# Allegro board M248V10_200119.brd
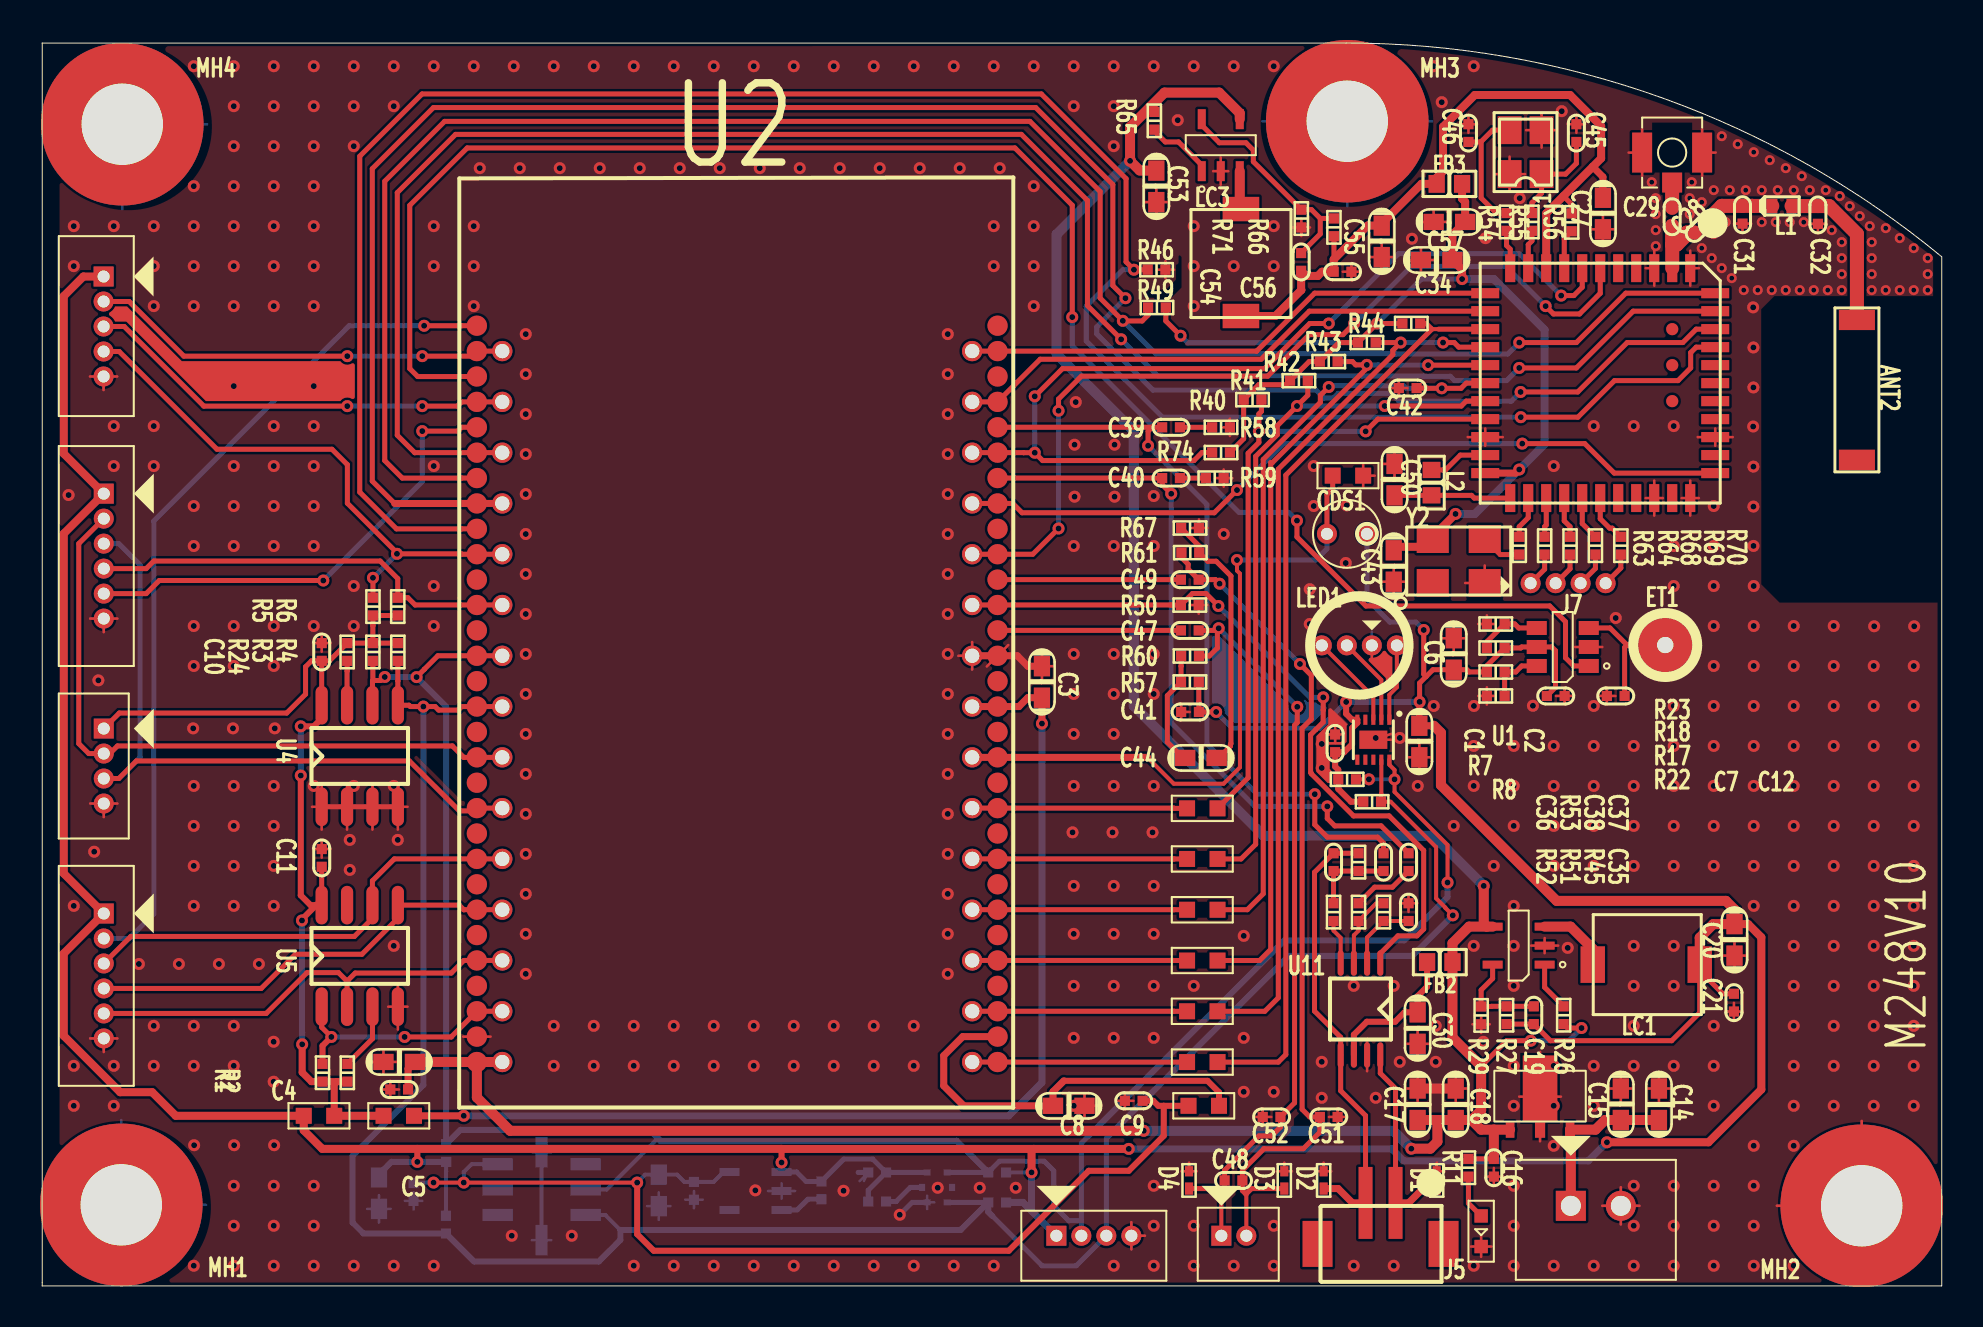
[diagram p0: board, top side]
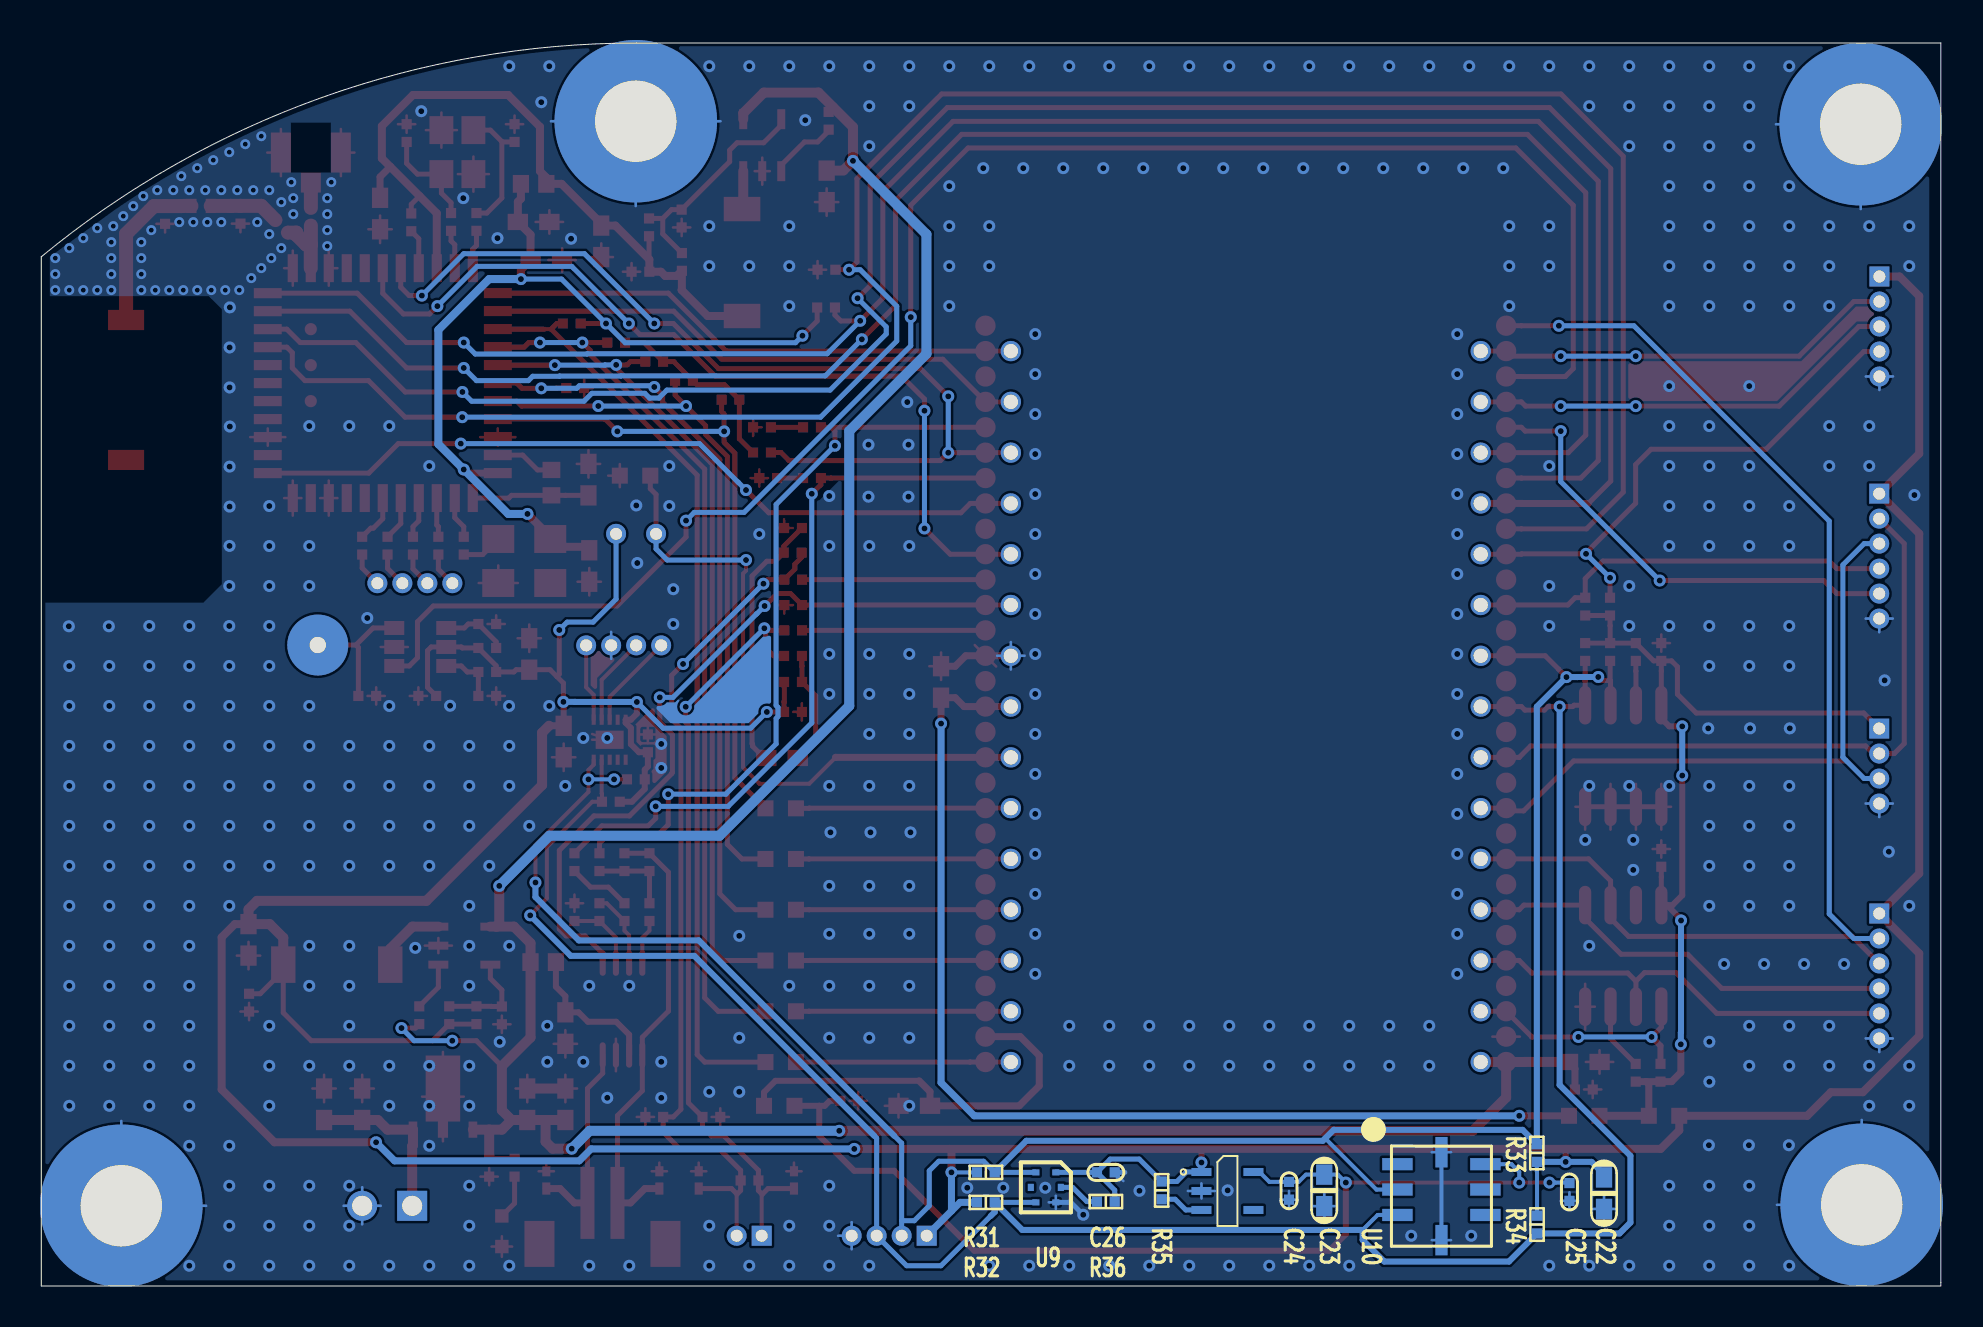
[diagram p1: board, bottom side, seen from below]

Outline 94.98 x 62.17 mm; copper layers: TOP, BOTTOM. Coordinates in mm from the lower left corner of the outline.
Outline path: 0,62.17 0,0 94.98,0 94.98,51.48 arc(81.03,59.42) 65.21,62.17 0,62.17

## Design rules (mm)
constraint set DEFAULT: min track width 0.127

## Placement (name value [footprint] x y rotation side)
ANT1  U.FL  [MM5829-2700]  81.5 56.69 180 top
ANT2  CHIP ANT  [AT7020]  89.74 40.82 0 top
C1  104  [C0402]  64.65 27.14 270 top
C2  1uF  [C0603]  68.86 27.23 270 top
C3  1uF  [C0603]  49.99 30.21 270 top
C4  104  [C0402]  17.85 9.83 0 top
C5  10uF  [C0603]  17.85 11.2 180 top
C6  4.7uF  [C0603]  70.58 31.61 270 top
C7  104  [C0402]  75.68 29.51 180 top
C8  1uF  [C0603]  51.33 9.01 180 top
C9  104  [C0402]  54.58 9.26 0 top
C10  104  [C0402]  13.98 31.71 270 top
C11  104  [C0402]  13.98 21.41 270 top
C12  101  [C0402]  78.68 29.51 0 top
C14  10uF  [C0603]  80.84 9.09 90 top
C15  1uF  [C0603]  78.94 9.09 270 top
C16  104  [C0402]  72.59 5.91 90 top
C17  10uF  [C0603]  68.78 9.09 90 top
C18  10uF  [C0603]  70.68 9.09 90 top
C19  103  [C0402]  74.58 13.54 270 top
C20  10uF  [C0603]  84.62 17.31 270 top
C21  104  [C0402]  84.59 14.17 90 top
C22  1uF  [C0603]  16.84 4.64 90 bottom
C23  2.2uF  [C0603]  30.83 4.78 90 bottom
C24  104  [C0402]  32.59 4.76 90 bottom
C25  104  [C0402]  18.57 4.7 90 bottom
C26  104  [C0402]  41.75 5.68 0 bottom
C27  4.7uF  [C0603]  78.04 53.64 270 top
C28  33pF  [C0402]  82.96 53 45 top
C29  NC  [C0402]  81.5 53.48 270 top
C30  2.2uF  [C0603]  68.78 12.9 90 top
C31  NC  [C0402]  85.02 53.58 90 top
C32  NC  [C0402]  88.79 53.57 90 top
C34  1uF  [C0603]  69.73 51.31 0 top
C35  1uF  [C0402]  68.32 18.7 270 top
C36  1000pF  [C0402]  64.57 21.2 90 top
C37  33nF  [C0402]  68.32 21.2 270 top
C38  33nF  [C0402]  67.07 21.2 270 top
C39  104  [C0402]  56.45 42.95 180 top
C40  104  [C0402]  56.45 40.41 180 top
C41  1uF  [C0402]  57.39 28.71 0 top
C42  NI-27pF  [C0402]  68.28 44.91 0 top
C43  4.7uF  [C0603]  67.58 36.01 90 top
C44  10uF  [C0603]  57.94 26.41 180 top
C45  10pF  [C0402]  76.71 57.66 270 top
C46  10pF  [C0402]  71.31 57.66 270 top
C47  104  [C0402]  57.38 32.79 0 top
C48  101  [C0402]  59.57 5.28 180 top
C49  104  [C0402]  57.38 35.33 0 top
C50  4.7uF  [C0603]  67.62 40.33 270 top
C51  33pF  [C0402]  64.33 8.45 180 top
C52  33pF  [C0402]  61.47 8.45 0 top
C53  10uF  [C0603]  55.71 55 270 top
C54  103  [C0402]  62.95 51.22 270 top
C55  10uF  [C0603]  66.98 52.25 270 top
C56  104  [C0402]  65.02 50.73 180 top
C57  2.2uF  [C0603]  70.36 53.22 0 top
CDS1  GL3528  [CDS3330]  65.24 37.62 180 top
D1  NI-ESD5451X  [FBP-02C]  69.73 5.28 90 top
D2  NI-ESD5451X  [FBP-02C]  64.08 5.28 90 top
D3  NI-ESD5451X  [FBP-02C]  62.11 5.28 90 top
D4  NI-ESD5451X  [FBP-02C]  57.34 5.28 90 top
ET1  E-TRODE  [ET30]  81.16 32.06 0 top
FB2  600R/100M  [L0603]  69.88 16.2 180 top
FB3  600R/100M  [L0603]  70.36 55.12 0 top
J1  WAFER 1.25 4P  [CCX-W125-04]  3.08 26.01 0 top
J2  WAFER 1.25 5P  [CCX-W125-05]  3.08 48.01 0 top
J3  WAFER 1.25 6P  [CCX-W125-06]  3.08 36.51 0 top
J4  WAFER 2.5 2P  [CX-W250-02]  78.94 4.01 270 top
J5  WAFER 1.5 2P  [CCZ-W150-02]  66.87 2.1 180 top
J6  WAFER 1.25 2P  [CCX-W125-02]  59.58 2.51 90 top
J7  NI-CON4  [PIN-W125-04]  76.3 35.15 0 top
J8  WAFER 1.25 4P  [CCX-W125-04]  52.58 2.51 90 top
J9  WAFER 1.25 6P  [CCX-W125-06]  3.08 15.51 0 top
L1  1uH  [L0402]  86.99 54.02 0 top
L2  4.7uH  [L0603]  69.47 40.18 90 top
LC1  GTSD53P-3R3M  [GTSD53P]  80.2 16.07 90 top
LC3  GTSD53P-3R3M  [GTSD53P]  59.94 51.19 0 top
LED1  RGB 5mm  [RGBLED-4P]  65.86 32.04 180 top
LED2  GREEN  [LED0603]  71.95 2.74 270 top
MH1  -  [4MMP8]  3.96 4.06 0 top
MH2  -  [4MMP8]  90.98 4.01 0 top
MH3  -  [4MMP8]  65.26 58.26 0 top
MH4  -  [4MMP8]  4.01 58.11 0 top
R1  10K  [R0402]  14.02 10.66 90 top
R2  10K  [R0402]  15.26 10.66 90 top
R3  10K  [R0402]  16.54 31.71 270 top
R4  10K  [R0402]  17.78 31.71 270 top
R5  10K  [R0402]  16.54 33.98 90 top
R6  10K  [R0402]  17.78 33.98 90 top
R7  10K  [R0402]  65.25 25.34 180 top
R8  10K  [R0402]  66.5 24.22 180 top
R11  1K  [R0402]  71.31 5.91 270 top
R12  NI-0R  [R0603]  58.01 23.89 180 top
R13  NI-0R  [R0603]  58.01 21.36 180 top
R14  NI-33R  [R0603]  58.01 18.82 180 top
R15  NI-0R  [R0603]  58.01 16.28 180 top
R16  NI-0R  [R0603]  58.01 13.74 180 top
R17  NI-1K  [R0402]  72.68 30.71 180 top
R18  NI-1K  [R0402]  72.68 31.91 0 top
R19  NI-0R  [R0603]  58.01 11.2 180 top
R20  1K  [R0603]  65.29 40.53 180 top
R21  NI-0R  [R0603]  58.08 9.01 180 top
R22  1K  [R0402]  72.68 29.51 0 top
R23  1K  [R0402]  72.68 33.11 0 top
R24  NI-1K  [R0402]  15.25 31.71 90 top
R26  100K  [R0402]  76.08 13.54 90 top
R27  453K  [R0402]  73.22 13.54 90 top
R29  100K  [R0402]  71.95 13.53 90 top
R31  4.7K  [R0402]  47.75 5.68 0 bottom
R32  NI-1K  [R0402]  47.75 4.18 0 bottom
R33  4.7K  [R0402]  20.2 6.65 270 bottom
R34  NI-1K  [R0402]  20.19 3.07 90 bottom
R35  100K  [R0402]  38.96 4.78 270 bottom
R36  100K  [R0402]  41.75 4.22 0 bottom
R40  33K  [R0402]  60.52 44.33 180 top
R41  33K  [R0402]  62.84 45.28 180 top
R42  33K  [R0402]  64.33 46.23 180 top
R43  33K  [R0402]  66.23 47.19 180 top
R44  33K  [R0402]  68.46 48.14 180 top
R45  20K  [R0402]  67.07 18.7 90 top
R46  NI-10K  [R0402]  55.72 50.83 180 top
R49  10K  [R0402]  55.74 48.94 0 top
R50  100K  [R0402]  57.38 34.06 0 top
R51  20K  [R0402]  65.82 18.7 270 top
R52  20K  [R0402]  64.57 18.7 270 top
R53  33K  [R0402]  65.82 21.2 90 top
R54  0R  [R0402]  73.22 53.22 90 top
R55  0R  [R0402]  74.49 53.22 90 top
R56  10K  [R0402]  76.48 53.2 90 top
R57  1K  [R0402]  57.39 30.21 180 top
R58  22R  [R0402]  58.95 42.95 180 top
R59  22R  [R0402]  58.63 40.41 180 top
R60  1K5  [R0402]  57.39 31.51 180 top
R61  1K5  [R0402]  57.41 36.68 180 top
R63  0R  [R0402]  73.86 37.03 90 top
R64  0R  [R0402]  75.12 37.03 90 top
R65  100K  [R0402]  55.61 58.28 270 top
R66  453K  [R0402]  64.59 52.95 90 top
R67  1K  [R0402]  57.39 37.91 180 top
R68  0R  [R0402]  76.4 37.03 90 top
R69  0R  [R0402]  77.67 37.03 90 top
R70  0R  [R0402]  78.94 37.03 90 top
R71  100K  [R0402]  62.96 53.39 90 top
R74  100K  [R0402]  58.95 41.69 180 top
R75  0R  [R0603]  17.83 8.51 180 top
R76  NI-0R  [R0603]  13.84 8.51 0 top
U1  AW2103DNR  [DFN10_2X2]  66.56 27.32 180 top
U2  V3S MODULE  [V3S_MODULE]  46.5 46.76 0 top
U3  TTP223-BA6  [SOT23-6]  77.33 31.01 90 top
U4  24C02  [SOIC-8]  15.88 26.51 0 top
U5  MX25L12835F  [SOIC-8]  15.88 16.51 0 top
U6  WS3202K  [SOT89]  76.4 7.82 90 top
U7  RT8059GJ5  [SOT23-5]  75.12 16.07 90 top
U8  RT9013-30PB  [SOT23-5]  36.97 5.7 270 bottom
U9  HTS221TR  [HLGA-6L]  44.75 4.93 270 bottom
U10  ZM01  [ZM01_5X5]  24.97 4.49 180 bottom
U11  LM4890  [MSOP-8]  65.92 13.85 180 top
U12  AP6236  [QFN44_12X12]  77.91 45.16 270 top
U13  RT8059GJ5  [SOT23-5]  57.98 55.76 0 top
Y1  26MHz/10ppm  [XTL3225]  74.17 56.71 90 top
Y2  32.768KHz  [XTL5032]  70.83 36.26 0 top

## Library data of the parts
ANT1 = CONN_COAX_1_1_P_2MH_V1_0
ANT2 = TEST POINT_1
C1 C4 C6 C9-C11 C16 C19 C21 C24 C39-C44 C47-C52 C54 C56 = CAPACITOR
C2 C5 C14 C17 C18 C20 C27 C53 C55 = CAPACITOR_3
C3 C8 C15 C22 C23 C30 C34 C57 = CAPACITOR_0: room: PMU
C7 C12 C25 C26 C28 C29 C31 C32 C35-C38 C45 C46 = CAPACITOR_0
CDS1 = A7RBS_1
D1-D4 = 1_1.5KE100A
ET1 = T_POINT_R_1
FB2 FB3 L1 L2 LC1 LC3 = INDUCTOR_0
J1 J8 = CONN RCPT 4
J2 = CONN RCPT 5
J3 J9 = CONN RCPT 6
J4 = CON2
J5 J6 = CONN RCPT 2
J7 = CON5_2
LED1 = WS3202K_4
LED2 = LED
MH1-MH4 = MTH9_0
R1-R6 R26 R27 R29 R35 R65 R66 R71 = RESISTOR
R7 R8 R11-R24 R31-R34 R36 R57 R60 R61 R67 R75 R76 = R
R40-R46 R49-R56 R63 R64 R68-R70 R74 = ?_0
R58 R59 = R1 0805
U1 = 24C16_2
U2 = MC100E196/LCC_14
U3 = RT9266PE_7
U4 = 24C16_0
U5 = SPI-NOR-SO8_1
U6 = WS3202K_3
U7 = XC9216_3
U8 = MC78PC18NTR_2
U9 = RT9266PE_12
U10 = RT9266PE_13
U11 = LY8006_0
U12 = 54259/FP_3
U13 = XC9216_2
Y1 = XTAL_4PIN_S
Y2 = XTAL_4PIN_S_2

## Footprints (pads in the part's own frame, mm; a bottom-side part is the same pattern mirrored in y, then rotated)
4MMP8
  round 8.128 hole 4.064: 1(0,0)
AT7020
  rect 1.803x1.016 smd: 1(1,7.5) 2(1,0.5)
C0402
  rect 0.508x0.508 smd: 1(-0.445,0) 2(0.445,0)
C0603
  rect 1.016x0.813 smd: 1(-0.787,0) 2(0.787,0)
CCX-W125-02
  rect 1x1 hole 0.6: 1(0,0.62)
  round 1 hole 0.6: 2(0,-0.63)
CCX-W125-04
  rect 1x1 hole 0.6: 1(0,1.87)
  round 1 hole 0.6: 2(0,0.62) 3(0,-0.63) 4(0,-1.88)
CCX-W125-05
  rect 1x1 hole 0.6: 1(-0.01,2.48)
  round 1 hole 0.6: 2(-0.01,1.23) 3(-0.01,-0.02) 4(-0.01,-1.27) 5(-0.01,-2.52)
CCX-W125-06
  rect 1x1 hole 0.6: 1(0,3.12)
  round 1 hole 0.6: 2(0,1.87) 3(0,0.62) 4(0,-0.63) 5(0,-1.88) 6(0,-3.13)
CCZ-W150-02
  rect 1.5x2.3 smd: (-3.2,0) (3.1,0)
  rect 0.7x3.6 smd: 1(-0.8,-2.05) 2(0.7,-2.05)
CDS3330
  round 1 hole 0.6: 1(-1,0) 2(1,0)
CX-W250-02
  rect 1.501x1.501 hole 1.001: 1(0,-2.5)
  round 1.5 hole 1: 2(0,0)
DFN10_2X2
  rect 0.203x0.508 smd: 1(-0.8,-1) 2(-0.4,-1) 3(0,-1) 4(0.4,-1) 5(0.8,-1) 6(0.8,1) 7(0.4,1) 8(0,1) 9(-0.4,1) 10(-0.8,1)
  rect 1.397x0.914 smd: 11(0,0)
ET30
  round 3.048 hole 0.813: 1(0,0)
FBP-02C
  rect 0.61x0.406 smd: 1(-0.406,0)
  rect 0.508x0.406 smd: 2(0.457,0)
GTSD53P
  rect 1.829x1.219 smd: 1(0,2.675) 2(0,-2.675)
HLGA-6L
  rect 0.305x0.356 smd: 1(-0.75,0.5) 2(-0.75,-0.5) 4(0.75,-0.5) 5(0.75,0.5)
  rect 0.356x0.305 smd: 3(0,-0.75) 6(0,0.75)
L0402
  rect 0.508x0.711 smd: 1(-0.483,0) 2(0.483,0)
L0603
  rect 0.813x0.889 smd: 1(-0.635,0) 2(0.635,0)
LED0603
  rect 0.671x0.671 smd: 1(-0.762,0) 2(0.768,0)
MM5829-2700
  rect 1x2 smd: 1(-1.5,0) 3(1.5,0)
  rect 1x1 smd: 2(0,1.5)
MSOP-8
  oval 0.305x1.27 smd: 1(-0.991,-2.299) 2(-0.33,-2.299) 3(0.33,-2.299) 4(0.991,-2.299) 5(0.991,2.299) 6(0.33,2.299) 7(-0.33,2.299) 8(-0.991,2.299)
PIN-W125-04
  round 1 hole 0.6: 1(-1.875,0) 2(-0.625,0) 3(0.625,0) 4(1.875,0)
QFN44_12X12
  rect 1.397x0.508 smd: 1(-5.75,4.5) 2(-5.75,3.6) 3(-5.75,2.7) 4(-5.75,1.8) 5(-5.75,0.9) 6(-5.75,0) 7(-5.75,-0.9) 8(-5.75,-1.8) 9(-5.75,-2.7) 10(-5.75,-3.6) 11(-5.75,-4.5) 23(5.75,-4.5) 24(5.75,-3.6) 25(5.75,-2.7) 26(5.75,-1.8) 27(5.75,-0.9) 28(5.75,0) 29(5.75,0.9) 30(5.75,1.8) 31(5.75,2.7) 32(5.75,3.6) 33(5.75,4.5)
  rect 0.508x1.397 smd: 12(-4.5,-5.75) 13(-3.6,-5.75) 14(-2.7,-5.75) 15(-1.8,-5.75) 16(-0.9,-5.75) 17(0,-5.75) 18(0.9,-5.75) 19(1.8,-5.75) 20(2.7,-5.75) 21(3.6,-5.75) 22(4.5,-5.75) 34(4.5,5.75) 35(3.6,5.75) 36(2.7,5.75) 37(1.8,5.75) 38(0.9,5.75) 39(0,5.75) 40(-0.9,5.75) 41(-1.8,5.75) 42(-2.7,5.75) 43(-3.6,5.75) 44(-4.5,5.75)
  round 0.61 smd: 45(-2.7,3.6) 46(-0.9,3.6) 47(0.9,3.6)
R0402
  rect 0.508x0.508 smd: 1(-0.445,0) 2(0.445,0)
R0603
  rect 0.8x0.8 smd: 1(-0.762,0) 2(0.762,0)
RGBLED-4P
  round 1 hole 0.6: 1(-1.875,0) 2(-0.625,0) 3(0.625,0) 4(1.875,0)
SOIC-8
  oval 0.61x1.93 smd: 1(-1.905,-2.54) 2(-0.635,-2.54) 3(0.635,-2.54) 4(1.905,-2.54) 5(1.905,2.54) 6(0.635,2.54) 7(-0.635,2.54) 8(-1.905,2.54)
SOT23-5
  rect 0.4x1 smd: 1(0,0) 2(0.95,0) 3(1.9,0) 4(1.9,2.6) 5(0,2.6)
SOT23-6
  rect 0.7x1 smd: 1(0,0) 2(0.95,0) 3(1.9,0) 4(1.9,2.6) 5(0.95,2.6) 6(0,2.6)
SOT89
  rect 0.813x0.432 smd: 1(0,2.997) 3(0,0)
  custom 4.115x1.727 smd: 2(1.651,1.499)
V3S_MODULE
  round 1.016 smd: 1(1.27,0) 2(1.27,-2.54) 3(1.27,-5.08) 4(1.27,-7.62) 5(1.27,-10.16) 6(1.27,-12.7) 7(1.27,-15.24) 8(1.27,-17.78) 9(1.27,-20.32) 10(1.27,-22.86) 11(1.27,-25.4) 12(1.27,-27.94) 13(1.27,-30.48) 14(1.27,-33.02) 15(1.27,-35.56) 16(-24.765,-35.56) 17(-24.765,-33.02) 18(-24.765,-30.48) 19(-24.765,-27.94) 20(-24.765,-25.4) 21(-24.765,-22.86) 22(-24.765,-20.32) 23(-24.765,-17.78) 24(-24.765,-15.24) 25(-24.765,-12.7) 26(-24.765,-10.16) 27(-24.765,-7.62) 28(-24.765,-5.08) 29(-24.765,-2.54) 30(-24.765,0) 31(1.27,1.27) 32(1.27,-1.27) 33(1.27,-3.81) 34(1.27,-6.35) 35(1.27,-8.89) 36(1.27,-11.43) 37(1.27,-13.97) 38(1.27,-16.51) 39(1.27,-19.05) 40(1.27,-21.59) 41(1.27,-24.13) 42(1.27,-26.67) 43(1.27,-29.21) 44(1.27,-31.75) 45(1.27,-34.29) 46(-24.765,-34.29) 47(-24.765,-31.75) 48(-24.765,-29.21) 49(-24.765,-26.67) 50(-24.765,-24.13) 51(-24.765,-21.59) 52(-24.765,-19.05) 53(-24.765,-16.51) 54(-24.765,-13.97) 55(-24.765,-11.43) 56(-24.765,-8.89) 57(-24.765,-6.35) 58(-24.765,-3.81) 59(-24.765,-1.27) 60(-24.765,1.27)
  round 1.016 hole 0.711: 61(0,0) 62(0,-2.54) 63(0,-5.08) 64(0,-7.62) 65(0,-10.16) 66(0,-12.7) 67(0,-15.24) 68(0,-17.78) 69(0,-20.32) 70(0,-22.86) 71(0,-25.4) 72(0,-27.94) 73(0,-30.48) 74(0,-33.02) 75(0,-35.56) 76(-23.495,-35.56) 77(-23.495,-33.02) 78(-23.495,-30.48) 79(-23.495,-27.94) 80(-23.495,-25.4) 81(-23.495,-22.86) 82(-23.495,-20.32) 83(-23.495,-17.78) 84(-23.495,-15.24) 85(-23.495,-12.7) 86(-23.495,-10.16) 87(-23.495,-7.62) 88(-23.495,-5.08) 89(-23.495,-2.54) 90(-23.495,0)
XTL3225
  rect 1.397x1.194 smd: 1(-1.1,-0.8) 2(1.1,-0.8) 3(1.1,0.8) 4(-1.1,0.8)
XTL5032
  rect 1.6x1.397 smd: 1(-1.3,-1.1) 2(1.3,-1.1) 3(1.3,1.1) 4(-1.3,1.1)
ZM01_5X5
  rect 1.524x0.61 smd: 1(-2.2,1.6) 2(-2.2,0.33) 3(-2.2,-0.94) 5(2.2,-0.94) 6(2.2,0.33) 7(2.2,1.6)
  rect 0.61x1.524 smd: 4(0,-2.2) 8(0,2.2)

## Nets
1V2: U2.55
1V8: U2.54
3.3VOUT: C3.2 R75.1 U2.8 U2.68
3V3: U2.53
5VIN: C14.1 C15.2 J4.1 U6.3
5VSB: C4.2 C5.1 C16.2 C17.1 C18.1 C53.1 FB2.1 R11.1 R26.1 R65.1 U2.16 U2.76 U6.1(OUT) U7.4(VIN) U13.4(VIN)
AVCC3V: C8.2 R21.1 U2.45
GND: ANT1.1 ANT1.3 C1.1 C2.2 C3.1 C4.1 C5.2 C6.1 C7.1 C8.1 C9.1 C10.1 C11.1 C12.1 C14.2 C15.1 C16.1 C17.2 C18.2 C20.2 C21.1 C22.1 C23.1 C24.1 C25.1 C26.1 C27.2 C30.1 C31.1 C32.1 C34.1 C35.1 C41.1 C42.1 C43.1 C45.1 C46.1 C50.1 C51.1 C52.1 C53.2 C55.2 C56.1 C57.1 D1.2(CATHODE) D2.2(CATHODE) D3.2(CATHODE) D4.2(CATHODE) J1.4 J2.5 J3.6 J4.2 J8.4 J9.6 LED1.2 LED2.2(CATHODE) MH1.1(NC) MH2.1(NC) MH3.1(NC) MH4.1(NC) R20.1 R22.1 R23.1 R29.1 R46.1 R50.2 R58.1 R59.1 R67.1 R71.1 U1.11 U2.7 U2.46 U2.67 U3.2 U4.1 U4.2 U4.3 U4.4 U5.4 U6.2 U7.2 U8.2 U9.5 U10.4 U10.8 U11.7 U12.1 U12.3 U12.20 U12.31 U12.33 U12.36 U13.2 Y1.2 Y1.4 Y2.2
VCC-DEVICE: C10.2 C11.2 J1.1 R1.1 R2.1 R3.1 R4.1 R5.1 R6.1 R24.2 R75.2 R76.2 U4.8 U5.8
VCC-IO: C1.2 C2.1 C6.2 C7.2 C19.2 C20.1 C21.2 C22.2 C26.2 C41.2 CDS1.1 J2.1 J3.1 J8.1 J9.1 LC1.2 R7.2 R8.2 R17.2 R18.2 R27.1 R31.2 R32.2 R33.2 R34.2 R35.1 R36.1 R57.1 R76.1 U1.5(VCC) U3.5(VDD) U8.1 U9.1(VDD)
VCC-WIFI: C27.1 C54.2 C55.1 C56.2 FB3.1 LC3.2 R56.2 R66.1 U12.9
VCC-WIFI-IO: C34.2 C43.2 C57.2 FB3.2 R40.2 R41.2 R42.2 R43.2 R44.2 R49.2 R74.1 U12.22 Y2.4(VCC)
AMP-PWRON: R50.1 U2.6 U2.66 U11.1
AP-PWRON#: J2.4 R5.2 U2.26 U2.86
BT-RST-N: U2.4 U2.64 U12.34
BT-UART-CTS: R49.1 U2.57 U12.44
BT-UART-RTS: R46.2 U2.56 U12.41
BT-UART-RX: U2.28 U2.88 U12.43
BT-UART-TX: U2.27 U2.87 U12.42
BT-WAKE-H: R74.2 U2.3 U2.63 U12.7
DH-PWRON#: J3.4 R6.2 U2.25 U2.85
DH-READY: J3.5 U2.58
H-WAKE-BT: U2.5 U2.65 U12.6
HPOUT-L: C38.1 C39.2 U2.33
HPOUT-R: C37.1 C40.2 U2.34
I2C0-SCK: J8.2 R3.2 R7.1 R31.1 R33.1 U1.10 U2.24 U2.84 U4.6 U9.2 U10.2
I2C0-SDA: J8.3 R4.2 R8.1 R32.1 R34.1 U1.9 U2.23 U2.83 U4.5 U9.4 U10.3
LRADC: CDS1.2 R20.2 U2.9 U2.69
MICIN-N: C49.1 U2.36
MICIN-P: C47.1 U2.37
PA-VDD: C30.2 FB2.2 U11.6
PWR-ONOFF: U2.59 U3.1
SPI-CLK: J9.3 U2.20 U2.80 U5.6
SPI-CS0: R1.2 U2.17 U2.77 U5.1
SPI-CS1: J9.2 U2.60
SPI-MISO: J9.5 U2.18 U2.78 U5.2
SPI-MOSI: J9.4 U2.19 U2.79 U5.5
SPI-WP: R2.2 U5.3(WP#)
SPI_RST: U5.7
SPK+: C36.2 D2.1 J5.2 R53.2 U11.5
SPK-: D1.1 J5.1 U11.8(VO2)
UART0-RX: J1.3 J3.3 U2.21 U2.81
UART0-TX: J1.2 J3.2 U2.22 U2.82
UART1-RX: J2.3 U2.29 U2.89
UART1-TX: J2.2 U2.30 U2.90
USB-DM: U2.39
USB-DP: U2.38
USB-ID: U2.40(USB_ID)
VIO3V: C9.2 C23.2 C24.2 C25.2 R21.2 U8.5(VOUT) U10.7(VCC)
WL-REG-ON: U2.1 U2.61 U12.12
WL-SDIO-CLK: C42.2 R14.1 U12.17
WL-SDIO-CMD: R15.1 R42.1 U12.16
WL-SDIO-D0: R13.1 R41.1 U12.18
WL-SDIO-D1: R12.1 R40.1 U12.19
WL-SDIO-D2: R19.1 R44.1 U12.14
WL-SDIO-D3: R16.1 R43.1 U12.15
WL-WAKE-H: U2.2 U2.62 U12.13
XTAL-IN: R55.1 U12.10
XTAL-OUT: R54.1 U12.11(XTAL_OUT)
N16646032: R24.1 U4.7(WP)
N16681779: C50.2 L2.1 U12.23
N16686655: LC1.1 U7.3
N16686799: C19.1 R27.2 R29.2 U7.5
N16686811: R26.2 U7.1
N16704485: C28.1 C29.2 U12.2
N16704493: C28.2 C31.2 L1.1
N16704505: ANT2.1 C32.2 L1.2
N16705442: L2.2 U12.21
N16707464: J7.1 R64.1
N16707468: J7.2 R68.1
N16707472: J7.3 R69.1
N16707476: J7.4 R70.1
N16707480: R63.1 Y2.3
N16707487: R64.2 U12.25
N16707494: R68.2 U12.26
N16707501: R69.2 U12.27
N16707508: R70.2 U12.28
N16709952: C45.2 R55.2 Y1.1
N16710226: C46.2 R54.2 Y1.3
N16731192: LC3.1 U13.3
N16731344: C54.1 R66.2 R71.2 U13.5
N16731362: R65.2 U13.1
N16733568: R17.1 R22.2 U3.6
N16733572: R18.1 R23.2 U3.4
N16733652: C12.2 ET1.1(TP) U3.3
N16761978: C35.2 R45.1 U11.2
N16762032: R45.2 R51.2 U11.3
N16762250: C37.2 R51.1
N16762324: C36.1 C38.2 R52.1 R53.1
N16762412: C39.1 R58.2
N16762416: C40.1 R59.2
N16763293: C44.2 R57.2 R60.2
N16763389: C44.1 R61.1 R67.2
N16763409: C47.2 C48.2 C52.2 D4.1 J6.1 R60.1
N16763465: C48.1 C49.2 C51.2 D3.1 J6.2 R61.2
N16768874: R52.2 U11.4
N16810329: LED1.1(RED) U1.1
N16810437: LED1.3 U1.2
N16810543: LED1.4 U1.3
N16859021: R35.2 U8.3
N16902590: R36.2 U9.6
N16911635: R63.2 U12.24
N16912563: R56.1 U12.8
N16913841: ANT1.2 C29.1
N16925501: LED2.1 R11.2
N16927790: R19.2 U2.15 U2.75
N16927822: R16.2 U2.14 U2.74
N16927854: R15.2 U2.13 U2.73
N16927886: R14.2 U2.12 U2.72
N16927918: R13.2 U2.11 U2.71
N16927950: R12.2 U2.10 U2.70

Pads without a net: ANT2 2; U1 4 6 7 8; U2 31 32 35 41 42 43 44 47 48 49 50 51 52; U8 4; U9 3; U10 1 5 6; U12 4 5 29 30 32 35 37 38 39 40 45 46 47; Y2 1

## Via types
v1: diameter 0.6, hole 0.3, TOP to BOTTOM, 579 vias
v2: diameter 0.5, hole 0.25, TOP to BOTTOM, 62 vias

## Routing (per net, layer and track width the routed paths; a pad name or vN(x,y) marks a point on that pad's centre or on a via; arc(x,y) is an arc through that point)
3.3VOUT: length 55
  TOP w0.35: U2.68 U2.8 48.84,28.98 49.28,29.42 C3.2 v1(49.99,28.13) ; R75.1 v1(21.08,8.51)
  BOTTOM w0.35: v1(21.08,8.51) 48.33,8.51 49.99,10.17 v1(49.99,28.13)
5VIN: length 8.5
  TOP w0.5: J4.1 76.44,6.99 76.4,7.03 U6.3 77.67,7.82 78.15,8.3 C15.2 C14.1
5VSB: length 148.5
  TOP w0.25: v1(74.43,12.27) 73.22,12.27 71.95,10.99 ; 54.85,55.82 54.88,55.79 ; v1(76.97,12.9) 76.27,12.9 R26.1 ; 71.31,6.36 72.59,6.36
  TOP w0.35: C4.2 18.3,10.86 C5.1 ; 55.38,58.95 55.61,58.73 R65.1
  TOP w0.5: 71.46,8.3 71.95,7.82 72.59,7.82 ; 71.46,8.3 71.95,8.79 71.95,10.99 70.52,12.42 FB2.1 70.52,17.15 71.34,17.97 72.23,17.97 ; 71.46,8.3 C18.1 69.73,8.3 ; U2.16 21.73,9.42 23.4,7.76 v1(55.08,7.76) ; U2.16 23,11.2 ; U2.16 20.85,11.2 20.85,11.2 C5.1 ; 72.23,17.97 U7.4 ; 72.23,17.97 72.08,18.12 v1(72.08,20.01) ; U13.4 59.88,58.66 58.85,59.69 56.12,59.69 54.39,57.96 v1(54.39,56.27) 54.85,55.82 ; C17.1 69.73,8.3 ; 69.73,8.3 69.76,8.26 69.76,7.22 69.41,6.87 v1(68.46,6.87) ; 54.88,55.79 C53.1 ; 72.59,7.82 72.59,6.36 ; 72.59,7.82 U6.1
  BOTTOM w0.25: v1(76.97,12.9) 76.34,12.27 v1(74.43,12.27)
  BOTTOM w0.5: v1(72.08,20.01) 69.57,22.52 61.07,22.52 54.58,29.01 54.58,42.76 50.72,46.62 50.72,52.6 v1(54.39,56.27) ; v1(68.46,6.87) 67.56,7.76 v1(55.08,7.76)
AVCC3V: length 20.6
  TOP w0.3: 51.08,10.26 58.27,10.26 58.84,9.69 R21.1
  TOP w0.35: 51.08,10.26 50.54,9.72 C8.2 46.08,9.01 45.08,10.01 45.08,11.52 46.03,12.47 U2.45
GND: length 271.3
  TOP w0.127: 16.38,11.2 C5.2 ; C5.2 17.06,10.62 ; C5.2 17.75,11.2 ; C5.2 17.06,11.79 ; 76.12,29.08 C7.1 ; C7.1 75.69,29.51 ; C7.1 76.12,29.94 ; C7.1 76.56,29.51 ; 75.12,16.64 U7.2 ; U7.2 75.8,17.02 ; U7.2 75.12,17.4 ; U7.2 74.45,17.02 ; 72.16,42.03 U12.20 ; U12.20 71.28,42.46 ; U12.20 72.16,42.89 ; U12.20 73.03,42.46 ; 74.9,7.23 U6.2 ; U6.2 75.94,9.47 ; U6.2 74.9,11.7 ; U6.2 73.85,9.47 ; 71.95,1.46 LED2.2 ; LED2.2 72.46,1.97 ; LED2.2 71.95,2.48 ; LED2.2 71.44,1.97 ; 82.84,50.91 U12.1 82.41,50.03 ; 13.97,22.82 U4.1 ; U4.1 13.97,25.11 ; U4.1 13.49,23.97 ; R46.1 56.16,51.26 ; R46.1 56.16,50.4 ; R46.1 55.73,50.83 ; R46.1 56.6,50.83 ; C20.2 85.2,16.52 ; C20.2 84.62,17.21 ; C20.2 84.62,15.84 ; C20.2 84.03,16.52 ; 78.01,4.01 J4.2 ; J4.2 78.94,3.08 ; J4.2 78.94,4.94 ; J4.2 79.86,4.01 ; C34.1 68.94,51.9 ; C34.1 68.94,50.73 ; C34.1 68.25,51.31 ; C34.1 69.63,51.31 ; D4.2 57.34,6.17 ; D4.2 57.73,5.73 ; D4.2 56.96,5.73 ; R23.1 72.24,33.54 ; R23.1 71.8,33.11 ; R23.1 72.67,33.11 ; 78.35,9.87 C15.1 ; C15.1 78.94,10.56 ; C15.1 79.52,9.87 ; C15.1 78.94,9.19 ; 71.52,13.09 R29.1 ; R29.1 71.95,13.52 ; R29.1 71.95,12.66 ; R29.1 72.38,13.09 ; C53.2 55.71,54.9 ; C53.2 55.71,53.53 ; C53.2 56.29,54.21 ; C53.2 55.13,54.21 ; C57.1 70.26,53.22 ; C57.1 68.89,53.22 ; C57.1 69.58,52.64 ; C57.1 69.58,53.8 ; 71.8,29.51 R22.1 ; R22.1 72.24,29.94 ; R22.1 72.67,29.51 ; R22.1 72.24,29.08 ; R59.1 59.08,40.84 ; R59.1 59.08,39.98 ; R59.1 58.64,40.41 ; R59.1 59.51,40.41 ; 83.66,42.03 U12.36 ; U12.36 83.66,42.89 ; U12.36 82.78,42.46 ; U12.36 84.53,42.46 ; 49.99,30.31 C3.1 ; C3.1 50.57,31 ; C3.1 49.99,31.68 ; 58.93,55.08 U13.2 ; U13.2 59.31,55.76 ; U13.2 58.55,55.76 ; U13.2 58.93,56.44 ; C9.1 54.57,9.26 ; C9.1 54.14,8.83 ; C9.1 54.14,9.69 ; C9.1 53.7,9.26 ; 15.25,25.11 U4.2 15.25,22.82 ; 85.02,52.7 C31.1 ; C31.1 84.59,53.14 ; C31.1 85.45,53.14 ; 64.34,8.45 C51.1 ; C51.1 64.77,8.02 ; C51.1 64.77,8.88 ; C51.1 65.21,8.45 ; 84.59,13.29 C21.1 ; C21.1 84.59,14.16 ; C21.1 84.16,13.73 ; C21.1 85.02,13.73 ; 78.04,52.17 C27.2 ; C27.2 78.62,52.85 ; C27.2 77.46,52.85 ; C27.2 78.04,53.54 ; U4.4 17.79,25.11 ; U4.4 17.79,22.82 ; U4.4 18.27,23.97 ; C32.1 89.22,53.13 ; C32.1 88.79,52.69 ; C32.1 88.36,53.13 ; D3.2 62.49,5.73 ; D3.2 62.11,6.17 ; D3.2 61.73,5.73 ; C41.1 57.38,28.71 ; C41.1 56.95,29.14 ; C41.1 56.95,28.28 ; 80.26,9.87 C14.2 ; C14.2 81.42,9.87 ; C14.2 80.84,10.56 ; C14.2 80.84,9.19 ; 54.46,1.83 J8.4 ; J8.4 54.46,3.19 ; J8.4 55.14,2.51 ; 63.69,5.73 D2.2 ; D2.2 64.08,6.17 ; D2.2 64.46,5.73 ; Y2.2 73.11,35.16 ; Y2.2 72.13,36.04 ; Y2.2 71.15,35.16 ; 2.4,12.38 J9.6 ; J9.6 3.08,11.7 ; J9.6 3.76,12.38 ; 47.23,30.98 U2.7 48.31,32.06 ; C35.1 68.32,19.57 ; C35.1 68.32,18.71 ; C35.1 67.89,19.14 ; C35.1 68.75,19.14 ; U12.31 81.04,39.41 ; U12.31 80.61,40.28 ; U12.31 80.17,39.41 ; U12.31 80.61,38.53 ; 13.98,31.72 C10.1 ; C10.1 14.41,32.15 ; C10.1 13.98,32.59 ; C10.1 13.54,32.15 ; 2.4,33.38 J3.6 ; J3.6 3.76,33.38 ; J3.6 3.08,32.7 ; C55.2 67.56,51.46 ; C55.2 66.98,52.15 ; C55.2 66.98,50.78 ; C55.2 66.4,51.46 ; C18.2 70.68,10.56 ; C18.2 71.26,9.87 ; C18.2 70.68,9.19 ; 90.98,8.25 MH2.1 86.74,4.01 ; C46.1 71.75,58.11 ; C46.1 70.88,58.11 ; C46.1 71.31,58.54 ; C46.1 71.31,57.68 ; 70.58,31.71 C6.1 ; C6.1 71.16,32.4 ; C6.1 70,32.4 ; C6.1 70.58,33.08 ; R20.1 66.05,41.11 ; R20.1 66.05,39.95 ; R20.1 66.63,40.53 ; 67.04,41.12 C50.1 ; C50.1 67.62,40.43 ; C50.1 68.2,41.12 ; C50.1 67.62,41.8 ; C52.1 61.46,8.45 ; C52.1 60.6,8.45 ; C52.1 61.03,8.88 ; C52.1 61.03,8.02 ; 62.96,52.51 R71.1 ; R71.1 62.96,53.38 ; R71.1 63.39,52.95 ; R71.1 62.53,52.95 ; 68.78,11.42 C30.1 ; C30.1 68.78,12.8 ; C30.1 69.36,12.11 ; C30.1 68.19,12.11 ; 72.6,55.61 Y1.4 ; Y1.4 74.15,55.61 ; Y1.4 73.37,56.49 ; Y1.4 73.37,54.74 ; U12.33 82.41,40.28 ; U12.33 82.41,38.53 ; U12.33 81.97,39.41 ; U12.33 82.84,39.41 ; C42.1 67.84,45.34 ; C42.1 67.84,44.48 ; C42.1 68.27,44.91 ; C42.1 67.4,44.91 ; 67.58,34.54 C43.1 ; C43.1 67,35.22 ; C43.1 68.16,35.22 ; C43.1 67.58,35.91 ; 13.98,21.42 C11.1 ; C11.1 14.41,21.85 ; C11.1 13.54,21.85 ; C11.1 13.98,22.29 ; 57.39,34.06 R50.2 ; R50.2 57.83,33.63 ; R50.2 58.26,34.06 ; 65.03,50.73 C56.1 ; C56.1 65.46,51.16 ; C56.1 65.9,50.73 ; C56.1 65.46,50.3 ; 68.78,9.19 C17.2 ; C17.2 68.78,10.56 ; C17.2 68.19,9.87 ; C1.1 64.65,28.02 ; C1.1 64.65,27.15 ; C1.1 64.22,27.58 ; C1.1 65.08,27.58 ; U2.67 46.5,32.21 ; U2.67 45.81,31.52 ; U2.67 46.5,30.83 ; 67.44,27.61 U1.11 67.44,27.32 ; 82.41,51.78 82.41,51.35 ; 78.01,31.96 U3.2 76.65,31.96 ; 68.28,26.44 C2.2 ; C2.2 68.86,25.76 ; C2.2 69.44,26.44 ; C2.2 68.86,27.13 ; 3.07,44.81 J2.5 ; J2.5 2.39,45.49 ; J2.5 3.75,45.49 ; 80.61,50.03 U12.3 ; U12.3 80.61,51.78 ; U12.3 80.17,50.91 ; 16.52,25.11 U4.3 16.52,22.82 ; 74.97,56.94 Y1.2 ; Y1.2 75.75,57.81 ; Y1.2 74.2,57.81 ; Y1.2 74.97,58.69 ; U5.4 18.27,13.97 ; U5.4 17.79,15.11 ; U5.4 17.3,13.97 ; U5.4 17.79,12.82 ; J1.4 3.76,24.13 ; J1.4 3.08,23.45 ; J1.4 2.4,24.13 ; 52.12,8.43 C8.1 ; C8.1 52.12,9.59 ; C8.1 52.8,9.01 ; D1.2 70.11,5.73 ; D1.2 69.73,6.17 ; D1.2 69.35,5.73 ; 77.8,29.51 C12.1 ; C12.1 78.67,29.51 ; C12.1 78.24,29.08 ; C12.1 78.24,29.94 ; 66.48,31.36 LED1.2 ; 80,55.51 ANT1.3 ; ANT1.3 80,57.87 ; ANT1.3 79.32,56.69 ; ANT1.1 83.68,56.69 ; ANT1.1 83,57.87 ; ANT1.1 83,55.51 ; 22.42,12.47 U2.46 21.05,12.47 ; C16.1 72.59,5.9 ; C16.1 72.15,5.47 ; C16.1 72.59,5.04 ; C16.1 73.02,5.47 ; R67.1 58.27,37.91 ; R67.1 57.84,38.34 ; R67.1 57.41,37.91 ; 16.97,9.83 C4.1 ; C4.1 17.41,10.26 ; C4.1 17.84,9.83 ; C4.1 17.41,9.39 ; 58.96,42.95 R58.1 ; R58.1 59.39,42.52 ; R58.1 59.39,43.38 ; 76.28,58.11 C45.1 ; C45.1 76.71,58.54 ; C45.1 76.71,57.68 ; C45.1 77.14,58.11 ; 66.25,10.74 U11.7 66.25,12.36
  TOP w0.25: U4.1 U4.2 U4.3 U4.4
  TOP w0.35: 82.41,51.35 U12.1 ; U2.67 U2.7 48.76,31.52 49.28,31 C3.1
  TOP w0.5: C18.2 C17.2
  BOTTOM w0.127: C25.1 18.57,4.69 ; C25.1 18.14,4.26 ; C25.1 19,4.26 ; C25.1 18.57,3.82 ; U8.2 36.97,5.13 ; U8.2 37.65,4.75 ; U8.2 36.29,4.75 ; U8.2 36.97,4.37 ; 3.08,11.7 J9.6 ; J9.6 3.76,12.38 ; J9.6 2.4,12.38 ; 25.45,6.69 U10.8 24.49,6.69 ; J1.4 3.76,24.13 ; J1.4 3.08,23.45 ; J1.4 2.4,24.13 ; J2.5 3.75,45.49 ; J2.5 3.07,44.81 ; J2.5 2.39,45.49 ; 78.01,4.01 J4.2 ; J4.2 78.94,3.08 ; J4.2 79.86,4.01 ; J4.2 78.94,4.94 ; J3.6 3.76,33.38 ; J3.6 2.4,33.38 ; J3.6 3.08,32.7 ; MH3.1 69.5,58.26 ; MH3.1 65.26,54.02 ; MH3.1 61.01,58.26 ; 66.48,32.72 LED1.2 66.48,31.36 ; 25.45,2.29 U10.4 24.49,2.29 ; C22.1 16.84,4.54 ; C22.1 16.84,3.17 ; C22.1 17.42,3.85 ; C22.1 16.26,3.85 ; 3.96,8.3 MH1.1 8.2,4.06 ; U2.67 47.19,31.52 ; U2.67 46.5,32.21 ; U2.67 46.5,30.83 ; U2.67 45.81,31.52 ; C23.1 30.83,4.68 ; C23.1 30.83,3.31 ; C23.1 30.25,3.99 ; C23.1 31.41,3.99 ; 41.09,5.25 C26.1 40.87,5.25 ; U9.5 44.25,4.51 ; U9.5 44.61,4.18 ; U9.5 44.25,3.85 ; 4.01,53.87 MH4.1 8.25,58.11 ; J8.4 54.46,3.19 ; J8.4 55.14,2.51 ; J8.4 54.46,1.83 ; 32.59,3.88 C24.1 ; C24.1 32.16,4.32 ; C24.1 32.59,4.75 ; C24.1 33.02,4.32 ; 90.98,8.25 MH2.1 86.74,4.01
  BOTTOM w0.2: U10.8 U10.4
  BOTTOM w0.25: C26.1 40.8,5.68 ; v1(42.88,3.56) 43.5,4.18 U9.5
  vias: v1(1.32,39.56) v1(1.58,53.01) v1(1.58,51.01) v1(1.58,19.01) v1(1.58,11.01) v1(1.58,9.01) v1(2.6,21.72) v1(2.81,30.29) v1(3.58,53.01) v1(3.58,43.01) v1(3.58,41.01) v1(3.58,11.01) v1(3.58,9.01) v1(4.84,16.1) v1(5.58,53.01) v1(5.58,51.01) v1(5.58,49.01) v1(5.58,43.01) v1(5.58,41.01) v1(5.58,13.01) v1(5.58,11.01) v1(6.84,16.1) v1(7.58,61.01) v1(7.58,55.01) v1(7.58,53.01) v1(7.58,51.01) v1(7.58,49.01) v1(7.58,39.01) v1(7.58,37.01) v1(7.58,33.01) v1(7.58,31.01) v1(7.55,27.89) v1(7.58,25.01) v1(7.58,23.01) v1(7.58,21.01) v1(7.58,19.01) v1(7.58,13.01) v1(7.58,11.01) v1(7.6,7.04) v1(7.58,1.01) v1(8.84,16.1) v1(9.58,61.01) v1(9.58,59.01) v1(9.58,57.01) v1(9.58,55.01) v1(9.58,53.01) v1(9.58,51.01) v1(9.58,49.01) v1(9.58,45.01) v1(9.58,41.01) v1(9.58,39.01) v1(9.58,37.01) v1(9.58,33.01) v1(9.58,31.01) v1(9.54,27.89) v1(9.58,25.01) v1(9.58,23.01) v1(9.58,21.01) v1(9.58,19.01) v1(9.58,13.01) v1(9.58,11.01) v1(9.6,7.04) v1(9.58,5.01) v1(9.58,3.01) v1(9.58,1.01) v1(10.84,16.1) v1(11.58,61.01) v1(11.58,59.01) v1(11.58,57.01) v1(11.58,55.01) v1(11.58,53.01) v1(11.58,51.01) v1(11.58,49.01) v1(11.58,43.01) v1(11.58,41.01) v1(11.58,39.01) v1(11.58,37.01) v1(11.58,33.01) v1(11.58,31.01) v1(11.58,25.01) v1(11.58,23.01) v1(11.58,21.01) v1(11.58,19.01) v1(11.57,12.21) v1(11.57,10.21) v1(11.6,7.04) v1(11.58,5.01) v1(11.58,3.01) v1(11.58,1.01) v1(11.63,27.89) v1(13.58,61.01) v1(13.58,59.01) v1(13.58,57.01) v1(13.58,55.01) v1(13.58,53.01) v1(13.58,51.01) v1(13.58,49.01) v1(13.58,45.01) v1(13.58,43.01) v1(13.58,41.01) v1(13.58,39.01) v1(13.58,37.01) v1(13.58,33.01) v1(13.58,25.01) v1(13.58,5.01) v1(13.58,3.01) v1(13.58,1.01) v1(15.38,22.31) v1(15.38,20.81) v1(15.58,61.01) v1(15.58,59.01) v1(15.58,57.01) v1(15.58,35.01) v1(15.58,33.01) v1(15.58,25.01) v1(15.58,1.01) v1(17.58,61.01) v1(17.58,59.01) v1(17.58,25.01) v1(17.58,17.01) v1(17.58,1.01) v1(17.78,22.31) v1(19.58,61.01) v1(19.58,53.01) v1(19.58,51.01) v1(19.58,41.01) v1(19.58,35.01) v1(19.58,33.01) v1(19.58,1.01) v1(21.58,61.01) v1(21.58,53.01) v1(21.58,51.01) v1(21.58,49.01) v1(21.88,55.91) v1(23.48,2.51) v1(23.58,61.01) v1(23.88,55.91) v1(24.18,47.61) v1(24.18,45.61) v1(24.18,43.61) v1(24.18,41.61) v1(24.18,39.61) v1(24.18,37.61) v1(24.18,35.61) v1(24.18,33.61) v1(24.18,31.61) v1(24.18,29.61) v1(24.18,27.61) v1(24.18,25.61) v1(24.18,23.61) v1(24.18,21.61) v1(24.18,19.61) v1(24.18,17.61) v1(24.18,15.61) v1(25.58,61.01) v1(25.58,13.01) v1(25.58,11.01) v1(25.88,55.91) v1(26.48,2.51) v1(27.58,61.01) v1(27.58,13.01) v1(27.58,11.01) v1(27.88,55.91) v1(29.58,61.01) v1(29.58,13.01) v1(29.58,11.01) v1(29.58,1.01) v1(29.88,55.91) v1(31.58,61.01) v1(31.58,13.01) v1(31.58,11.01) v1(31.58,1.01) v1(31.88,55.91) v1(33.58,61.01) v1(33.58,13.01) v1(33.58,11.01) v1(33.58,1.01) v1(33.88,55.91) v1(35.58,61.01) v1(35.58,13.01) v1(35.58,11.01) v1(35.58,1.01) v1(35.66,4.78) v1(35.88,55.91) v1(37.58,61.01) v1(37.58,13.01) v1(37.58,11.01) v1(37.58,1.01) v1(37.88,55.91) v1(39.58,61.01) v1(39.58,13.01) v1(39.58,11.01) v1(39.58,1.01) v1(39.88,55.91) v1(40.07,4.76) v1(41.58,61.01) v1(41.58,13.01) v1(41.58,11.01) v1(41.58,1.01) v1(41.88,55.91) v1(43.58,61.01) v1(43.58,13.01) v1(43.58,11.01) v1(43.58,1.01) v1(43.88,55.91) v1(44.78,4.91) v1(45.28,47.61) v1(45.28,45.61) v1(45.28,43.61) v1(45.28,41.61) v1(45.28,39.61) v1(45.28,37.61) v1(45.28,35.61) v1(45.28,33.61) v1(45.28,31.61) v1(45.28,29.61) v1(45.28,27.61) v1(45.28,25.61) v1(45.28,23.61) v1(45.28,21.61) v1(45.28,19.61) v1(45.28,17.61) v1(45.28,15.61) v1(45.58,61.01) v1(45.58,1.01) v1(45.88,55.91) v1(46.88,4.91) v1(47.58,61.01) v1(47.58,53.01) v1(47.58,51.01) v1(47.58,1.01) v1(47.88,55.91) v1(48.68,4.91) v1(49.58,61.01) v1(49.58,55.01) v1(49.58,53.01) v1(49.58,51.01) v1(49.58,49.01) v1(51.52,22.69) v1(51.58,61.01) v1(51.58,59.01) v1(51.62,42.08) v1(51.62,39.48) v1(51.58,37.01) v1(51.58,31.61) v1(51.58,29.61) v1(51.58,27.61) v1(51.58,25.01) v1(51.58,20.01) v1(51.58,17.61) v1(51.58,15.01) v1(51.58,12.41) v1(51.58,9.01) v1(51.68,44.21) v1(53.52,22.69) v1(53.58,61.01) v1(53.58,59.01) v1(53.58,57.01) v1(53.62,42.08) v1(53.62,39.48) v1(53.58,37.01) v1(53.58,31.61) v1(53.58,29.61) v1(53.58,27.61) v1(53.58,25.01) v1(53.58,20.01) v1(53.58,17.61) v1(53.58,15.01) v1(53.58,12.41) v1(53.58,1.01) v1(55.52,22.69) v1(55.58,61.01) v1(55.58,39.51) v1(55.58,37.01) v1(55.58,31.61) v1(55.58,29.61) v1(55.58,25.01) v1(55.58,20.01) v1(55.58,17.61) v1(55.58,15.01) v1(55.58,12.41) v1(55.58,5.01) v1(55.58,3.01) v1(55.58,1.01) v1(56.78,58.31) v1(57.58,61.01) v1(57.58,53.01) v1(57.58,51.01) v1(57.58,49.01) v1(57.58,15.01) v1(57.58,3.01) v1(57.58,1.01) v1(59.08,37.61) v1(59.58,61.01) v1(59.58,51.01) v1(59.58,1.01) v1(60.08,17.51) v1(60.08,12.41) v1(60.08,9.71) v1(61.58,61.01) v1(61.58,53.01) v1(61.58,51.01) v1(61.58,9.71) v1(61.58,3.01) v1(61.58,1.01) v1(63.38,34.85) v1(63.38,33.11) v1(63.58,41.01) v1(63.58,39.01) v1(63.98,27.11) v1(63.98,25.91) v1(63.98,11.21) v1(63.98,9.41) v1(65.23,39.04) v1(65.18,36.16) v1(65.58,15.01) v1(65.58,1.01) v1(66.68,27.41) v1(66.68,9.41) v1(67.58,15.01) v1(67.58,1.01) v1(67.88,27.41) v1(67.88,11.21) v1(68.49,52.38) v1(68.78,25.01) v1(69.58,61.01) v1(69.58,29.01) v1(69.68,13.01) v1(69.68,11.21) v1(69.98,59.21) v1(70.58,23.01) v1(71.58,61.01) v1(71.59,29.01) v1(71.58,27.01) v1(71.58,25.01) v1(71.58,17.01) v1(71.58,1.01) v1(72.06,12.21) v1(72.17,52.41) v1(72.58,21.01) v1(73.58,27.01) v1(73.58,25.01) v1(73.58,23.01) v1(73.58,19.01) v1(73.58,17.01) v1(73.58,15.01) v1(73.58,11.01) v1(73.58,9.01) v1(73.58,5.01) v1(73.58,3.01) v1(73.58,1.01) v1(73.88,54.41) v1(74.54,29.02) v1(75.58,41.01) v1(75.58,27.01) v1(75.58,25.01) v1(75.58,23.01) v1(75.58,21.01) v1(75.58,11.01) v1(75.58,9.01) v1(75.58,7.01) v1(75.58,1.01) v1(75.98,58.76) v1(76.28,16.91) v1(77.58,43.01) v1(77.58,29.01) v1(77.58,27.01) v1(77.58,25.01) v1(77.58,23.01) v1(77.58,21.01) v1(77.58,11.01) v1(77.58,9.01) v1(77.58,1.01) v1(78.68,33.41) v1(79.58,43.01) v1(79.58,27.01) v1(79.58,25.01) v1(79.58,23.01) v1(79.58,21.01) v1(79.58,17.01) v1(79.58,15.01) v1(79.58,13.01) v1(79.58,11.01) v1(79.58,5.01) v1(79.58,3.01) v1(79.58,1.01) v1(81.58,43.01) v1(81.58,37.01) v1(81.58,35.01) v1(81.58,29.01) v1(81.58,27.01) v1(81.58,25.01) v1(81.58,23.01) v1(81.58,21.01) v1(81.58,17.01) v1(81.58,15.01) v1(81.58,11.01) v1(81.58,5.01) v1(81.58,3.01) v1(81.58,1.01) v1(83.58,39.01) v1(83.58,37.01) v1(83.58,35.01) v1(83.58,33.01) v1(83.58,31.01) v1(83.58,29.01) v1(83.58,27.01) v1(83.58,25.01) v1(83.58,23.01) v1(83.58,21.01) v1(83.58,13.01) v1(83.58,11.01) v1(83.58,9.01) v1(83.58,5.01) v1(83.58,3.01) v1(83.58,1.01) v1(85.55,48.95) v1(85.56,46.94) v1(85.56,44.94) v1(85.55,42.99) v1(85.56,40.98) v1(85.56,38.98) v1(85.57,37.01) v1(85.58,35.01) v1(85.58,33.01) v1(85.58,31.01) v1(85.58,29.01) v1(85.58,27.01) v1(85.58,25.01) v1(85.58,23.01) v1(85.58,21.01) v1(85.58,19.01) v1(85.58,7.01) v1(85.58,5.01) v1(85.58,3.01) v1(85.58,1.01) v1(87.58,33.01) v1(87.58,31.01) v1(87.58,29.01) v1(87.58,27.01) v1(87.58,25.01) v1(87.58,23.01) v1(87.58,21.01) v1(87.58,19.01) v1(87.58,17.01) v1(87.58,15.01) v1(87.58,13.01) v1(87.58,11.01) v1(87.58,9.01) v1(87.58,7.01) v1(87.58,1.01) v1(89.58,33.01) v1(89.58,31.01) v1(89.58,29.01) v1(89.58,27.01) v1(89.58,25.01) v1(89.58,23.01) v1(89.58,21.01) v1(89.58,19.01) v1(89.58,17.01) v1(89.58,15.01) v1(89.58,13.01) v1(89.58,11.01) v1(89.58,9.01) v1(91.6,33) v1(91.58,31.01) v1(91.58,29.01) v1(91.58,27.01) v1(91.58,25.01) v1(91.58,23.01) v1(91.58,21.01) v1(91.58,19.01) v1(91.58,17.01) v1(91.58,15.01) v1(91.58,13.01) v1(91.58,11.01) v1(91.58,9.01) v1(93.6,33) v1(93.58,31.01) v1(93.58,29.01) v1(93.58,27.01) v1(93.58,25.01) v1(93.58,23.01) v1(93.58,21.01) v1(93.58,19.01) v1(93.58,17.01) v1(93.58,15.01) v1(93.58,13.01) v1(93.58,11.01) v1(93.58,9.01) v2(80.48,55.21) v2(80.68,54.41) v2(80.68,53.61) v2(80.68,52.81) v2(80.68,52.01) v2(82.38,54.41) v2(82.38,53.61) v2(82.48,55.21) v2(82.98,54.21) v2(82.98,51.91) v2(83.48,51.41) v2(83.58,54.81) v2(83.58,52.61) v2(83.98,57.51) v2(83.98,50.91) v2(84.18,53.21) v2(84.38,54.81) v2(84.48,50.41) v2(84.78,57.11) v2(85.08,49.81) v2(85.18,54.81) v2(85.58,56.71) v2(85.78,49.81) v2(85.98,54.81) v2(85.98,53.21) v2(86.38,56.31) v2(86.48,49.81) v2(86.68,53.21) v2(86.78,54.81) v2(87.18,55.91) v2(87.18,49.81) v2(87.38,53.21) v2(87.58,54.81) v2(87.88,49.81) v2(87.98,55.51) v2(88.08,53.21) v2(88.38,54.81) v2(88.58,49.81) v2(89.18,54.81) v2(89.28,49.81) v2(89.48,52.81) v2(89.88,54.51) v2(89.98,52.21) v2(89.98,51.41) v2(89.98,50.61) v2(89.98,49.81) v2(90.38,54.01) v2(90.88,53.51) v2(91.38,53.01) v2(91.48,52.21) v2(91.48,51.41) v2(91.48,50.61) v2(91.48,49.81) v2(92.18,52.91) v2(92.18,49.81) v2(92.88,52.41) v2(92.88,49.81) v2(93.58,51.91) v2(93.58,49.81) v2(94.28,51.41) v2(94.28,50.61) v2(94.28,49.81)
VCC-DEVICE: length 50.9
  TOP w0.25: R3.1 R4.1 ; R3.1 R24.2 14.36,31.27 C10.2 ; R3.1 16.54,33.02 16.54,33.03 R5.1 R6.1 ; C10.2 13.98,30.76 13.97,30.76 U4.8 ; C10.2 13.47,31.27 13.17,30.97 13.17,29.6 12.23,28.66 3.86,28.66 J1.1 ; C11.2 13.98,20.46 13.97,20.46 U5.8
  TOP w0.3: v1(12.99,18.28) 12.99,18.34 13.7,19.05 13.42,19.05 12.93,19.54 v1(12.93,25.53) ; v1(12.93,27.99) 13.58,27.99 13.97,28.39 U4.8
  TOP w0.35: R76.2 14.6,10.09 14.73,10.22 ; v1(13,12.09) 13,10.68 13.46,10.22 R1.1 14.72,10.22 14.73,10.22 ; 14.73,10.22 R2.1 ; 13.7,19.05 U5.8
  TOP w0.4: R75.2 R76.2
  BOTTOM w0.3: v1(12.99,18.28) 12.99,12.68 13,12.67 v1(13,12.09) ; v1(12.93,25.53) v1(12.93,27.99)
VCC-IO: length 249.7
  TOP w0.25: 69.2,30.48 69.08,30.6 v1(69.08,32.81) ; 69.2,30.48 68.87,30.15 v1(68.87,29.22) ; 69.2,30.48 69.54,30.82 C6.2 71.24,30.82 71.35,30.71 R17.2 72.24,31.02 R18.2 73.93,31.91 73.98,31.96 U3.5 75.48,31.96 75.67,31.77 75.67,29.94 C7.2 ; 82.88,15.77 LC1.2 ; 82.88,15.77 82.88,13.67 81.48,12.27 75.41,12.27 C19.2 R27.1 ; 82.88,15.77 84.03,14.61 C21.2 ; v1(58.7,28.71) C41.2 57.84,29.22 57.83,29.22 R57.1
  TOP w0.3: 18.76,6.86 v1(18.76,6.21) ; 36.97,6.85 36.97,6.85 v1(36.97,6.17) ; v1(65.2,29.21) 65.2,28.62 65.5,28.32 U1.5 65.76,28.17 65.5,27.91 65.5,27.1 65.1,26.7 C1.2 64.65,25.98 64.81,25.82 R7.2 64.81,24.86 65.44,24.22 R8.2 ; v1(68.87,29.22) 68.87,29.1 68.86,29.09 C2.1
  TOP w0.35: C2.1 68.86,28.02 69.59,28.02
  TOP w0.4: J2.1 2.06,50.49 1.08,49.51 1.08,41.63 J3.1 1.08,37.63 1.08,20.63 J9.1 1.08,16.63 1.08,12.51 3.9,9.69 5.5,9.69 6.68,8.51 R76.1 13.08,7.78 14.01,6.86 36.97,6.86 36.97,6.85 49.58,6.85 ; v1(49.47,5.68) 49.47,6.74 49.58,6.85 ; 49.58,6.85 v1(54.33,6.85) ; C20.1 85.3,18.1 85.96,17.44 85.96,9.83 83.32,7.18 v1(78.24,7.18)
  TOP w0.5: 69.59,28.02 69.94,27.67 69.94,25.05 75.73,19.26 84.19,19.26 84.62,18.83 C20.1 83.56,18.1 82.88,17.42 LC1.2
  BOTTOM w0.2: 40.07,6.35 40.08,6.34 ; R31.2 v1(49.47,5.68) ; R33.2 20.2,5.72 20.19,5.71 20.19,4 R34.2
  BOTTOM w0.25: R36.1 41.31,4.79 C26.2 ; C26.2 U9.1 ; C26.2 41.53,6.34 40.08,6.34 R35.1 38.2,5.22 37.72,5.7 U8.1 ; v1(65.2,29.21) 63.89,27.9 59.51,27.9 v1(58.7,28.71) ; CDS1.1 66.24,34.35 67.39,33.2 68.69,33.2 v1(69.08,32.81)
  BOTTOM w0.3: v1(65.2,29.21) 68.29,29.21 68.29,29.22 v1(68.87,29.22) ; U8.1 v1(36.97,6.17) ; C22.2 16.84,5.58 17.46,6.21 v1(18.76,6.21) R33.2
  BOTTOM w0.35: v1(78.24,7.18) 77.31,6.26 68.08,6.26 67.49,6.85 v1(54.33,6.85) ; R32.2 49.04,4.18 49.47,3.75 ; 49.47,3.75 v1(49.47,5.68) ; 49.47,3.75 J8.1
VCC-WIFI: length 38.1
  TOP w0.25: 76.06,54.52 76.48,54.1 R56.2 ; 64.59,51.36 R66.1
  TOP w0.35: C27.1 78.04,55.47 77.53,55.98
  TOP w0.4: U12.9 75.2,53.66 77.95,56.4 77.95,58.02 76.4,59.57 71.63,59.57 70.05,57.98 70.05,55.76 69.73,55.44 FB3.1 68.97,55.12 66.98,53.14 C55.1 66.27,53.04 64.58,51.34 C56.2 63.99,50.73 63.78,50.52 63.21,50.52 C54.2 62.95,49.82 62.96,49.81 61.66,48.52 LC3.2
VCC-WIFI-IO: length 57.5
  TOP w0.25: v1(56.92,47.53) 56.18,48.27 R49.2 ; R74.1 60.08,42.37 R40.2 60.83,45.08 62.2,45.08 R41.2 63.35,46.23 R42.2 64.84,47.19 R43.2 v1(66.74,48.14) R44.2
  TOP w0.35: U12.22 73.67,40.66 v1(73.86,40.84)
  TOP w0.4: v1(71,50.36) 71,50.83 C34.2 70.51,52.59 C57.2 71.15,54.23 71,54.38 FB3.2 ; C43.2 67.75,36.97 69.14,36.97 Y2.4 69.53,37.47 v1(70.67,38.61)
  BOTTOM w0.25: v1(71,50.36) 68.97,50.36 v1(66.74,48.14) 65.78,47.18 57.27,47.18 v1(56.92,47.53)
  BOTTOM w0.4: v1(71,50.36) 72.59,50.36 75.12,47.82 75.12,42.11 v1(73.86,40.84) 71.63,38.61 v1(70.67,38.61)
AMP-PWRON: length 38.3
  TOP w0.25: v1(58.81,34.01) 58.19,34.63 57.52,34.63 R50.1 56.43,34.06 56.43,34.06 U2.6 U2.66 ; U11.1 66.91,16.63 67.79,17.51 68.74,17.51 69.08,17.85 69.08,21.78 67.35,23.51 65.57,23.51 63.46,25.62 63.46,25.64 63.42,25.68 63.42,27.57 63.68,27.82 63.68,27.83 64.05,28.2 64.05,28.79 64.05,28.82 v1(64.05,29.44)
  BOTTOM w0.25: v1(58.81,34.01) 59.2,33.62 59.21,33.62 63.39,29.44 v1(64.05,29.44)
AP-PWRON#: length 28
  TOP w0.25: J2.4 3.85,46.74 8.74,41.85 14.49,41.85 15.26,41.08 15.26,39.15 17.79,36.62 ; v1(17.74,36.62) 17.79,36.62 ; 17.79,36.62 20.96,36.62 20.98,36.6 U2.26 23,36.6 ; R5.2 v1(16.54,35.42)
  BOTTOM w0.25: v1(16.54,35.42) v1(17.74,36.62)
BT-RST-N: length 39.4
  TOP w0.25: v1(74.01,42.13) 77.13,42.13 78.61,40.66 U12.34 ; U2.64 U2.4 48.53,39.14 49,38.67 58.6,38.67 v1(59.74,39.81)
  BOTTOM w0.25: v1(74.01,42.13) 62.07,42.13 60.14,40.2 60.14,40.2 v1(59.74,39.81)
BT-UART-CTS: length 97.7
  TOP w0.25: v1(73.86,47.19) 76.71,47.19 79.18,49.66 U12.44 ; R49.1 55.3,48.56 55,48.27 54.04,48.27 v1(54.03,48.27) 52.9,49.41 52.9,54.74 49.39,58.25 20.12,58.25 17.13,55.26 17.13,41.28 18,40.41 20.97,40.41 20.98,40.41 U2.57
  BOTTOM w0.25: v1(73.86,47.19) 73.28,46.61 67.7,46.61 67.68,46.63 55.68,46.63 v1(54.03,48.27)
BT-UART-RTS: length 110
  TOP w0.25: U2.56 20.98,37.87 20.97,37.87 17.72,37.87 15.88,39.7 15.88,56.51 18.99,59.62 49.96,59.62 54.2,55.38 54.2,51.22 v1(54.59,50.83) R46.2 ; U12.41 82.7,46.96 82.43,46.68 82.43,45.92 81.79,45.28 78.62,45.28 76.79,43.45 v1(73.93,43.45)
  BOTTOM w0.25: v1(73.93,43.45) 56.01,43.45 52.2,47.27 52.2,49 54.03,50.83 v1(54.59,50.83)
BT-UART-RX: length 94.5
  TOP w0.25: v1(53.95,47.35) 52.26,49.03 52.26,54.3 48.96,57.6 20.67,57.6 17.75,54.69 17.75,42.55 18.63,41.68 18.63,41.68 U2.28 23,41.68 ; U12.43 79.55,48.76 76.71,45.92 v1(73.86,45.92)
  BOTTOM w0.25: v1(53.95,47.35) 55.78,45.52 66,45.52 66,45.51 69.06,45.51 69.07,45.5 70.41,45.5 70.62,45.28 73.22,45.28 v1(73.86,45.92)
BT-UART-TX: length 104.8
  TOP w0.25: v1(54.16,49.41) 53.53,50.03 53.53,55.09 49.68,58.94 19.56,58.94 16.5,55.88 16.5,40.26 17.62,39.14 ; U12.42 82.7,47.86 82.03,47.19 79.25,47.19 76.78,44.71 v1(73.92,44.71)
  TOP w0.35: 23,39.14 U2.27 20.93,39.14 20.92,39.14 17.62,39.14
  BOTTOM w0.25: v1(73.92,44.71) 73.46,44.25 67.84,44.25 67.45,44.65 64.8,44.65 64.56,44.41 64.1,44.41 63.7,44.81 55.54,44.81 52.73,47.62 52.73,47.97 v1(54.16,49.41)
BT-WAKE-H: length 47.5
  TOP w0.25: v1(49.63,44.5) 51.01,45.88 61.12,45.88 63.38,48.14 v1(64.33,48.14) ; U12.7 77.01,49.96 76.59,49.54 v1(75.95,49.54) ; R74.2 57.99,41.69 57.59,41.28 50.02,41.28 v1(49.63,41.68) 49.08,41.68 49.08,41.68 U2.3 U2.63
  BOTTOM w0.25: v1(75.95,49.54) 73.86,51.63 67.82,51.63 v1(64.33,48.14) ; v1(49.63,44.5) v1(49.63,41.68)
DH-PWRON#: length 21.6
  TOP w0.25: 23,34.06 U2.25 18.65,34.06 18.29,34.42 R6.2 17.78,35.38 16.9,36.26 5.58,36.26 5.2,35.88 J3.4
DH-READY: length 23.6
  TOP w0.25: U2.58 20.98,42.95 20.78,42.76 v1(19,42.76) ; v1(14.06,35.28) 5.85,35.28 5.2,34.63 J3.5
  BOTTOM w0.25: v1(14.06,35.28) 19,40.23 v1(19,42.76)
H-WAKE-BT: length 43.8
  TOP w0.25: v1(65.6,48.14) 65.04,47.58 63.35,47.58 61.28,45.51 51.96,45.51 50.82,44.36 v1(50.82,43.78) ; v1(50.82,37.89) 49.53,36.6 U2.5 U2.65 ; v1(75.17,49.01) 75.57,48.62 76.87,48.62 77.91,49.65 U12.6
  BOTTOM w0.25: v1(75.17,49.01) 73.19,51 68.46,51 v1(65.6,48.14) ; v1(50.82,43.78) v1(50.82,37.89)
HPOUT-L: length 37.8
  TOP w0.25: v1(55.3,42.03) 55.3,42.75 55.49,42.95 ; 56.06,42.95 C39.2 55.49,42.95 ; C38.1 67.07,22.15 66.77,22.45 64.26,22.45 63.63,23.07 v1(63.63,24.6) ; 55.49,42.95 55.49,42.95 U2.33
  BOTTOM w0.25: v1(55.3,42.03) 58.24,39.09 58.24,29.04 58.14,28.94 58.14,28.48 58.24,28.39 58.24,27.11 60.75,24.6 v1(63.63,24.6)
HPOUT-R: length 35.6
  TOP w0.25: v1(64.26,23.99) 64.26,23.39 64.63,23.01 66.95,23.01 C37.1 ; v1(56.45,39.62) 56,40.08 C40.2 55.49,40.41 55.49,40.41 U2.34
  BOTTOM w0.25: v1(64.26,23.99) 60.63,23.99 56.45,28.17 v1(56.45,39.62)
I2C0-SCK: length 113.4
  TOP w0.2: R7.1 v1(66.34,25.34) ; U1.10 67.36,26.07 67.62,25.81 v1(67.62,25.34) 67.62,24.71 70.27,22.06 v1(70.27,20.18)
  TOP w0.25: U4.6 16.52,30.26 16.54,30.28 ; 16.54,30.28 R3.2 ; 16.54,30.28 16.92,30.28 17.1,30.46 v1(17.13,30.46) ; v1(18.72,30.45) 19.11,30.85 19.11,30.85 19.78,31.52 U2.24 23,31.52
  BOTTOM w0.2: 30.78,7.38 28.22,4.82 U10.2 ; v1(66.34,25.34) v1(67.62,25.34)
  BOTTOM w0.25: 51.96,3.26 51.96,7.14 52.33,7.51 ; 51.96,3.26 51.33,3.26 50.58,4.01 50.58,5.76 50.1,6.24 47.86,6.24 R31.1 U9.2 ; 51.96,3.26 J8.2
  BOTTOM w0.3: v1(17.13,30.46) 18.16,30.46 18.16,30.45 v1(18.72,30.45) 20.2,28.97 R33.1 20.91,7.81 30.36,7.81 30.9,7.26 45.73,7.26 R31.1 ; 52.33,7.51 62.1,17.29 68.11,17.29 70.27,19.45 v1(70.27,20.18)
I2C0-SDA: length 117.6
  TOP w0.2: v1(70.53,18.54) 70.16,18.91 70.16,18.93 69.7,19.39 69.7,21.95 67.43,24.22 R8.1 66.94,24.61 66.96,24.63 U1.9
  TOP w0.25: R4.2 17.78,30.27 17.79,30.26 U4.5 18.34,29.05 18.41,28.98 v1(19.06,28.98) 19.65,28.98 19.82,28.8 20.8,28.8 20.98,28.98 U2.23 23,28.98
  BOTTOM w0.2: 28.91,2.8 28.16,3.55 U10.3
  BOTTOM w0.25: 53.33,7.51 53.21,7.39 J8.3 51.71,1.01 49.99,1.01 47.5,3.5 ; U9.4 R32.1
  BOTTOM w0.3: 53.33,7.51 62.33,16.51 68.51,16.51 v1(70.53,18.54) ; v1(19.06,28.98) 19.06,10.05 15.52,6.51 15.52,3.17 16.06,2.63 R34.1 21.6,1.22 27.83,1.22 28.91,2.3 28.91,2.8 45.93,2.8 R32.1 47.31,3.7 47.5,3.5
LRADC: length 33.2
  TOP w0.2: 55.26,26.44 56.58,25.12 59.07,25.12 59.89,25.94 59.89,35.63 59.74,35.78 v1(59.74,36.31)
  TOP w0.25: R20.2 64.53,39.88 64.24,39.59 CDS1.2
  TOP w0.35: 55.26,26.44 55.26,26.44 U2.9 U2.69
  BOTTOM w0.25: CDS1.2 64.24,36.87 63.68,36.31 v1(59.74,36.31)
MICIN-N: length 9.2
  TOP w0.25: C49.1 56.43,35.33 56.43,35.33 U2.36
MICIN-P: length 9.2
  TOP w0.25: C47.1 56.43,32.79 56.43,32.79 U2.37
PA-VDD: length 7.4
  TOP w0.3: U11.6 65.59,12.57 66.23,13.21 67.65,13.21 68.12,13.68 C30.2 68.78,14.49 69.25,14.97 FB2.2
PWR-ONOFF: length 88.2
  TOP w0.25: U2.59 20.98,45.49 20.97,45.49 18.78,45.49 18.38,45.88 18.38,54.05 21.25,56.92 48.64,56.92 51.5,54.06 v1(51.5,48.46) ; U3.1 76.58,31.01 76.17,31.42 76.17,33.22 75.38,34.01 66.19,34.01 62.74,37.46 v1(62.74,38.28)
  BOTTOM w0.25: v1(62.74,38.28) 62.33,38.69 59.84,38.69 51.5,47.02 v1(51.5,48.46)
SPI-CLK: length 23.2
  TOP w0.25: J9.3 4.43,17.48 15.61,17.48 16.52,18.39 U5.6 16.51,19.05 16.51,20.26 17.61,21.36 U2.20 23,21.36
SPI-CS0: length 12.3
  TOP w0.25: U5.1 13.97,12.94 v1(14.46,12.45) ; 23,13.74 U2.17 20.46,12.46 20.46,12.45 v1(18.12,12.45)
  TOP w0.3: v1(14.46,12.45) 14.02,12.01 R1.2
  BOTTOM w0.25: v1(14.46,12.45) v1(18.12,12.45)
SPI-CS1: length 42.9
  TOP w0.25: U2.60 20.98,48.03 20.97,48.03 v1(19.1,48.03)
  BOTTOM w0.25: J9.2 4.35,17.38 5.58,18.61 5.58,38.26 15.35,48.03 v1(19.1,48.03)
SPI-MISO: length 22.7
  TOP w0.25: J9.5 11.2,13.63 13.24,15.67 14.82,15.67 15.25,15.24 ; 15.25,15.24 15.65,15.65 20.45,15.65 21.08,16.28 U2.18 23,16.28 ; 15.25,15.24 U5.2
SPI-MOSI: length 22.1
  TOP w0.25: 23,18.82 U2.19 21.08,18.82 21.08,18.82 20.85,19.05 U5.5 17.79,18.39 15.99,16.59 12.66,16.59 10.95,14.88 J9.4
SPI-WP: length 3.4
  TOP w0.25: R2.2 16.52,12.37 U5.3
SPK+: length 22.6
  TOP w0.25: R53.2 C36.2 63.62,20.69 63.62,13.75 64.93,12.44 U11.5 64.93,9.76 66.17,8.52 J5.2
  TOP w0.35: J5.2 65.52,4.15 64.8,4.87 D2.1
SPK-: length 10.1
  TOP w0.25: U11.8 66.91,10.64 67.67,9.88 J5.1
  TOP w0.35: J5.1 68.32,4.15 69.04,4.87 D1.1
UART0-RX: length 35.5
  TOP w0.25: J1.3 3.83,25.38 4.71,26.26 18.36,26.26 20.86,23.76 21.59,23.76 U2.21 23,23.9
  BOTTOM w0.25: J3.3 3.83,37.13 4.9,36.06 4.9,26.45 3.83,25.38 J1.3
UART0-TX: length 33.5
  TOP w0.25: J3.2 1.83,37.13 1.83,27.13 2.33,26.63 J1.2 3.38,26.63 3.76,27.01 20.51,27.01 21.08,26.44 21.08,26.44 U2.22 23,26.44
UART1-RX: length 21.7
  TOP w0.25: v1(19,44.01) 20.76,44.01 20.98,44.22 U2.29 23,44.22 ; J2.3 4.1,47.99 8.08,44.01 v1(15.26,44.01)
  BOTTOM w0.25: v1(19,44.01) v1(15.26,44.01)
UART1-TX: length 21.2
  TOP w0.25: v1(15.26,46.51) 7.08,46.51 4.35,49.24 J2.2 ; 23,46.76 U2.30 21.48,46.51 v1(19,46.51)
  BOTTOM w0.25: v1(19,46.51) v1(15.26,46.51)
VIO3V: length 54.2
  TOP w0.2: v1(29.75,5.17) v1(21.08,5.17) v1(19.57,5.17)
  TOP w0.3: R21.2 56.08,9.01 ; 56.08,9.01 56.08,7.51 54.33,5.76 52.33,5.76 48.33,1.76 30.58,1.76 29.75,2.59 v1(29.75,5.17) ; 56.08,9.01 55.81,9.01 55.56,9.26 C9.2
  BOTTOM w0.2: U8.5 34.07,5.7 33.57,5.2 C24.2 32.11,5.2 31.75,5.57 C23.2 30.15,5.57 v1(29.75,5.17) ; v1(21.08,5.17) 21.08,5.7 21.47,6.09 U10.7 ; v1(19.57,5.17) 19.28,5.17 18.72,5.17 18.6,5.17 C25.2
WL-REG-ON: length 26.9
  TOP w0.25: U2.61 U2.1 60.72,46.76 60.72,46.76 63.62,49.66 U12.12
WL-SDIO-CLK: length 38.6
  TOP w0.25: C42.2 69.23,44.91 69.24,44.9 v1(69.98,44.9) 70.95,44.9 71.2,45.16 U12.17 ; R14.1 60.26,18.82 61.05,19.61 61.05,41.34 63.91,44.2 63.91,44.54 v1(64.33,44.96)
  BOTTOM w0.25: v1(64.33,44.96) 64.39,45.02 68.08,45.02 68.2,44.9 v1(69.98,44.9)
WL-SDIO-CMD: length 41.6
  TOP w0.25: v1(69.3,46.06) U12.16 ; R15.1 60.87,16.28 61.43,16.84 61.43,41.18 61.51,41.18 66.21,45.88 66.21,46.05 v1(66.23,46.07) 66.02,46.07 65.68,46.07 65.51,46.23 R42.1
  BOTTOM w0.25: v1(66.23,46.07) 66.79,46.07 66.8,46.06 v1(69.3,46.06)
WL-SDIO-D0: length 36
  TOP w0.25: v1(67.13,44.01) 70.96,44.01 71.2,44.26 U12.18 ; R41.1 63.28,44.55 v1(62.74,44.01) 61.76,43.03 61.76,42.58 60.68,41.5 60.68,22.09 59.95,21.36 R13.1
  BOTTOM w0.25: v1(67.13,44.01) v1(62.74,44.01)
WL-SDIO-D1: length 32.9
  TOP w0.25: U12.19 66.79,43.36 v1(66.17,42.74) ; R40.1 60.96,43.74 60.84,43.62 v1(60.84,42.74) 60.84,42.19 60.3,41.65 60.3,25.42 R12.1
  BOTTOM w0.25: v1(60.84,42.74) v1(66.17,42.74)
WL-SDIO-D2: length 46.2
  TOP w0.2: 69.49,47.86 69.83,47.86
  TOP w0.25: R44.1 69.2,48.14 69.49,47.86 62.18,40.56 62.18,11.57 61.81,11.2 R19.1 ; 69.83,47.86 U12.14
WL-SDIO-D3: length 44.2
  TOP w0.25: R16.1 61.13,13.74 61.81,14.41 61.81,40.85 67.53,46.58 67.53,46.79 v1(67.93,47.19) R43.1 ; v1(70.05,47.19) 70.6,47.19 70.83,46.96 U12.15
  BOTTOM w0.25: v1(67.93,47.19) v1(70.05,47.19)
WL-WAKE-H: length 27.5
  TOP w0.25: U12.13 63.36,48.76 60.96,46.35 49.9,46.35 U2.2 U2.62
XTAL-IN: length 1.9
  TOP w0.25: U12.10 74.31,52.08 74.49,52.27 R55.1
XTAL-OUT: length 1.9
  TOP w0.25: U12.11 73.41,51.86 73.22,52.04 R54.1
N16646032: length 2.2
  TOP w0.25: U4.7 15.25,30.75 15.25,30.76 R24.1
N16681779: length 5.8
  TOP w0.25: C50.2 68.77,39.54 68.77,39.54 L2.1 71.47,39.54 71.61,39.41 U12.23
N16686655: length 3.7
  TOP w0.5: LC1.1 77.53,16.86 76.42,17.97 U7.3
N16686799: length 5
  TOP w0.25: C19.1 R27.2 72.46,13.99 72.46,13.98 R29.2 71.95,14.8 72.53,15.38 U7.5
N16686811: length 2.5
  TOP w0.25: U7.1 75.12,14.94 R26.2
N16704485: length 3.6
  TOP w0.7: 81.5,52.09 C29.2 ; 81.5,52.09 81.51,52.08 U12.2 ; 81.5,52.09 81.74,52.09 82.23,52.58 82.23,52.69 C28.1
N16704493: length 3.5
  TOP w0.7: C28.2 83.98,54.02 C31.2 85.5,54.02 85.51,54.02 L1.1
N16704505: length 8.1
  TOP w0.7: ANT2.1 90.74,52.62 89.35,54.01 C32.2 87.96,54.01 87.95,54.02 L1.2
N16705442: length 3
  TOP w0.25: L2.2 70.17,40.81 70.91,41.56 U12.21
N16707464: length 1.7
  TOP w0.25: J7.1 75.12,35.85 R64.1
N16707468: length 1.7
  TOP w0.25: J7.2 76.4,35.87 R68.1
N16707472: length 1.7
  TOP w0.25: R69.1 77.67,35.89 J7.3
N16707476: length 1.7
  TOP w0.25: J7.4 78.94,35.91 R70.1
N16707480: length 2
  TOP w0.25: R63.1 72.91,36.58 Y2.3
N16707487: length 2
  TOP w0.25: U12.25 75.2,38.06 75.12,37.98 R64.2
N16707494: length 2.1
  TOP w0.25: U12.26 76.11,38.27 76.4,37.98 R68.2
N16707501: length 2.2
  TOP w0.25: U12.27 77.01,38.13 R69.2
N16707508: length 2.4
  TOP w0.25: R70.2 78.5,37.9 78.38,37.9 77.91,38.38 U12.28
N16709952: length 5.2
  TOP w0.25: R55.2 74.49,54.18 74.97,54.66 Y1.1 76.17,55.61 76.71,56.15 C45.2
N16710226: length 6.7
  TOP w0.25: C46.2 71.93,57.22 71.95,57.24 ; Y1.3 72.52,57.81 71.95,57.24 ; 71.95,57.24 71.95,54.42 72.7,53.66 R54.2
N16731192: length 1.9
  TOP w0.5: LC3.1 59.88,53.92 U13.3
N16731344: length 11.3
  TOP w0.25: U13.5 57.98,58.06 58.86,57.18 60.19,57.18 60.56,56.81 60.56,56.23 R71.2 63.47,53.83 63.91,53.39 ; C54.1 63.91,52.62 63.91,53.39 ; 63.91,53.39 R66.2
N16731362: length 3.4
  TOP w0.25: U13.1 57.98,56.06 56.82,57.22 56.16,57.22 55.61,57.77 R65.2
